# Altium PCB radxa_cm3_io_board_v1360_pcb_layout.PcbDoc (part 1 of 7)
Units mil, origin at the board's own origin, x right, y up, seen from the top; angles counter-clockwise.
Board outline 6299.61 x 3544.09 mil, 4 copper layers (Top, GND, Power, Bottom), stack 35.4 mil thick; 513 components, 397 nets, 1855 pads, 2695 vias.
Unrouted connection lines stored in the file: 280.
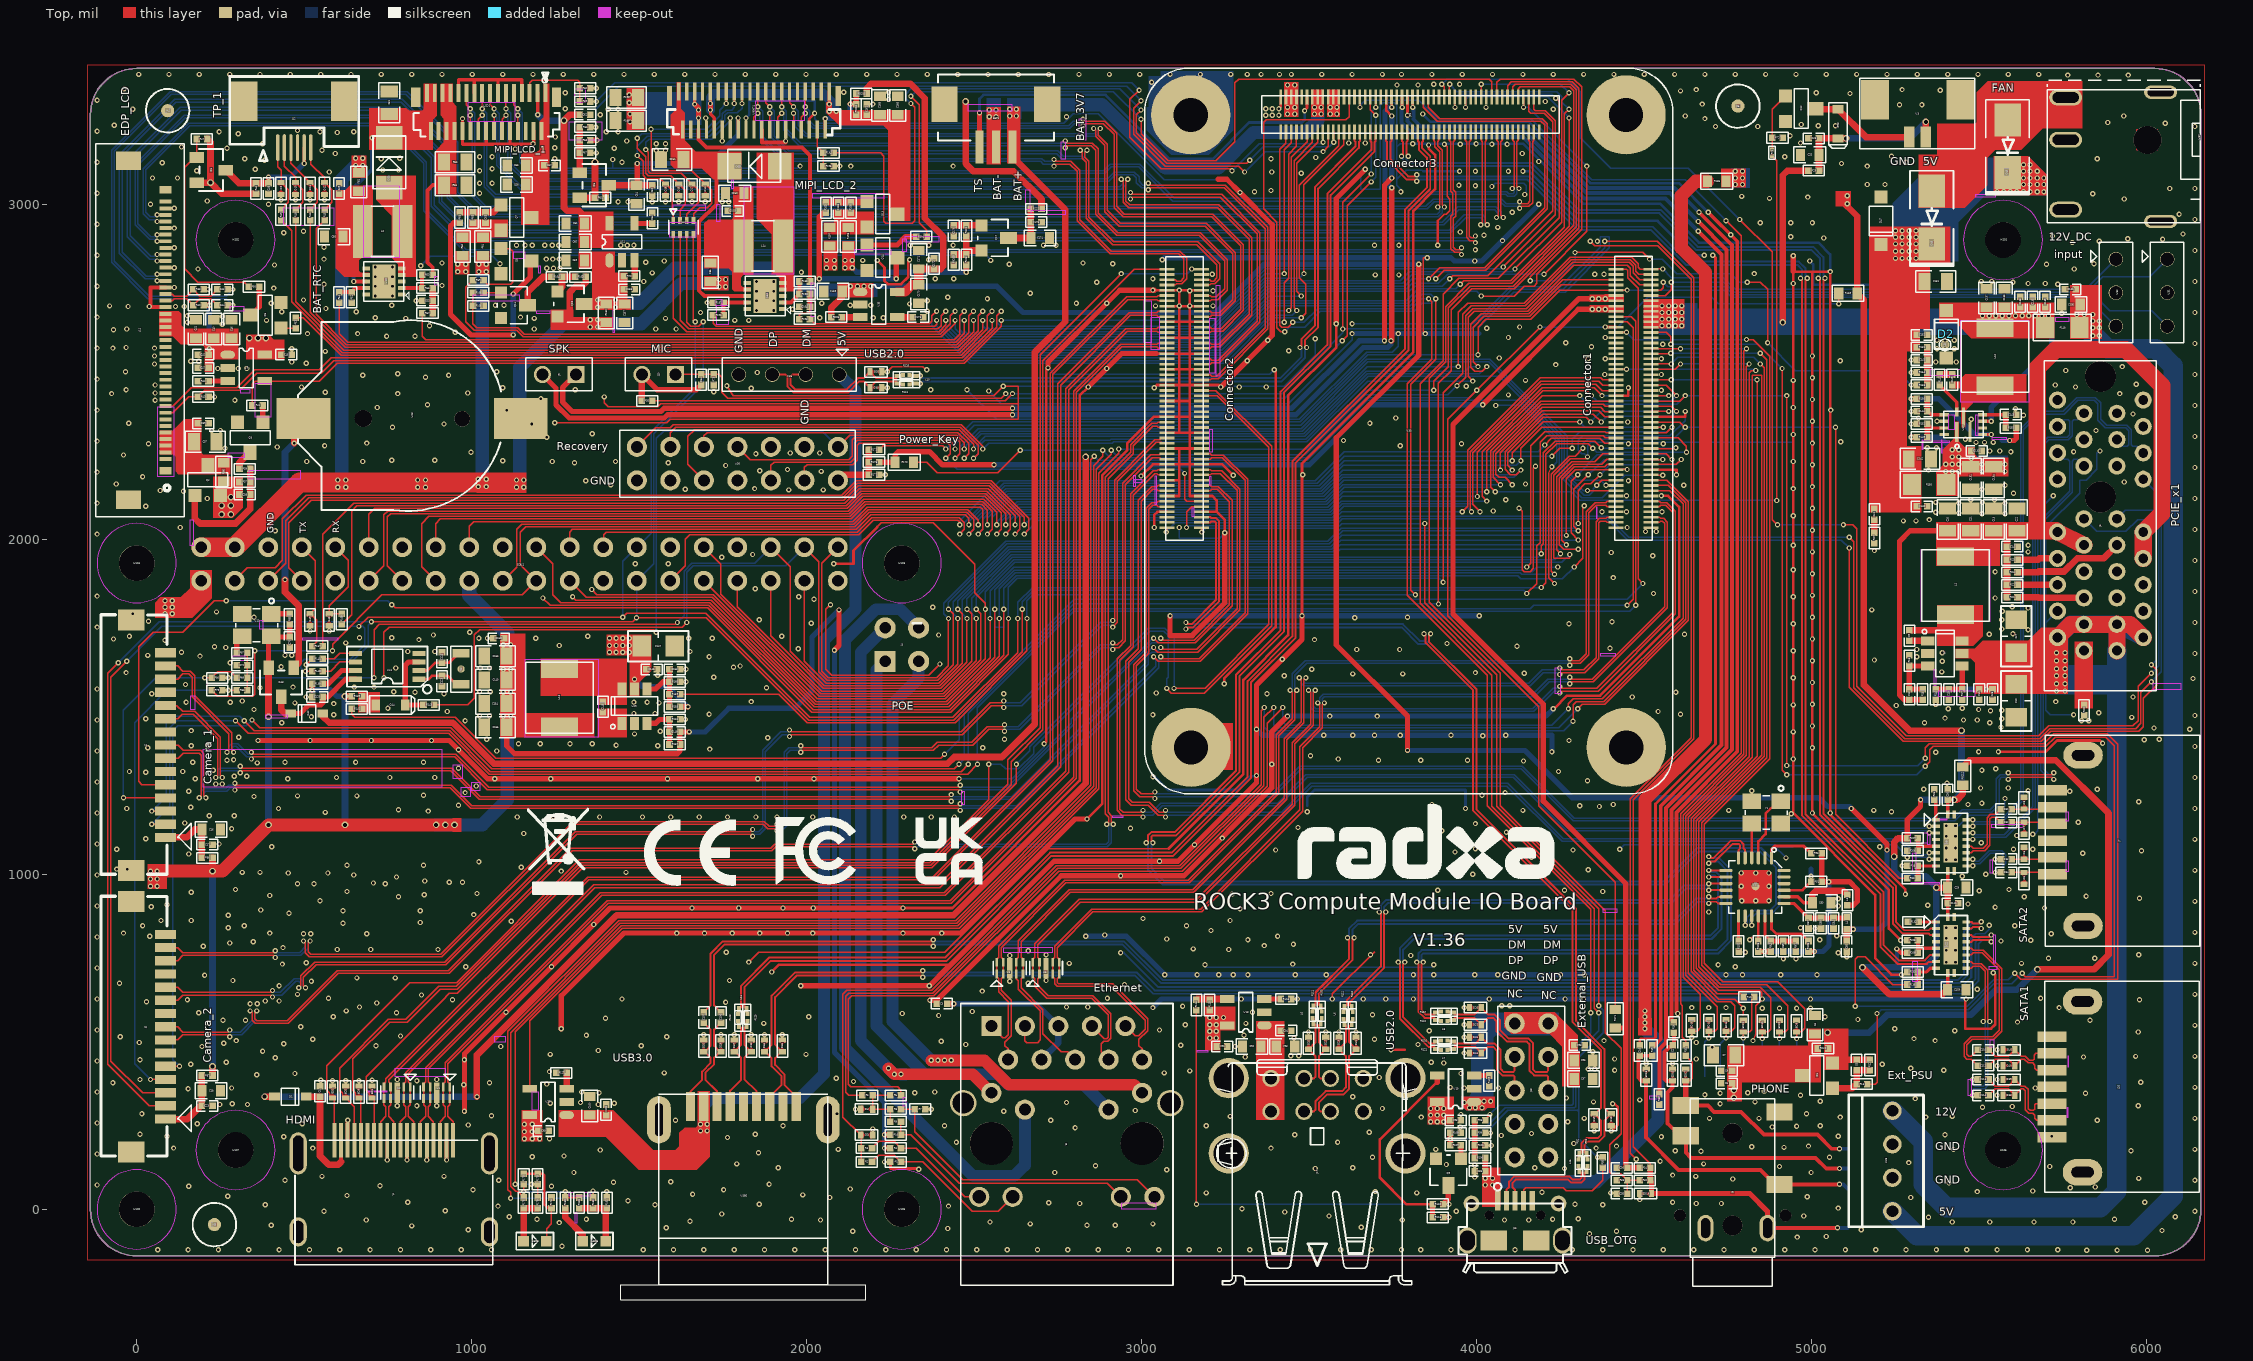
[diagram p0: Top view]
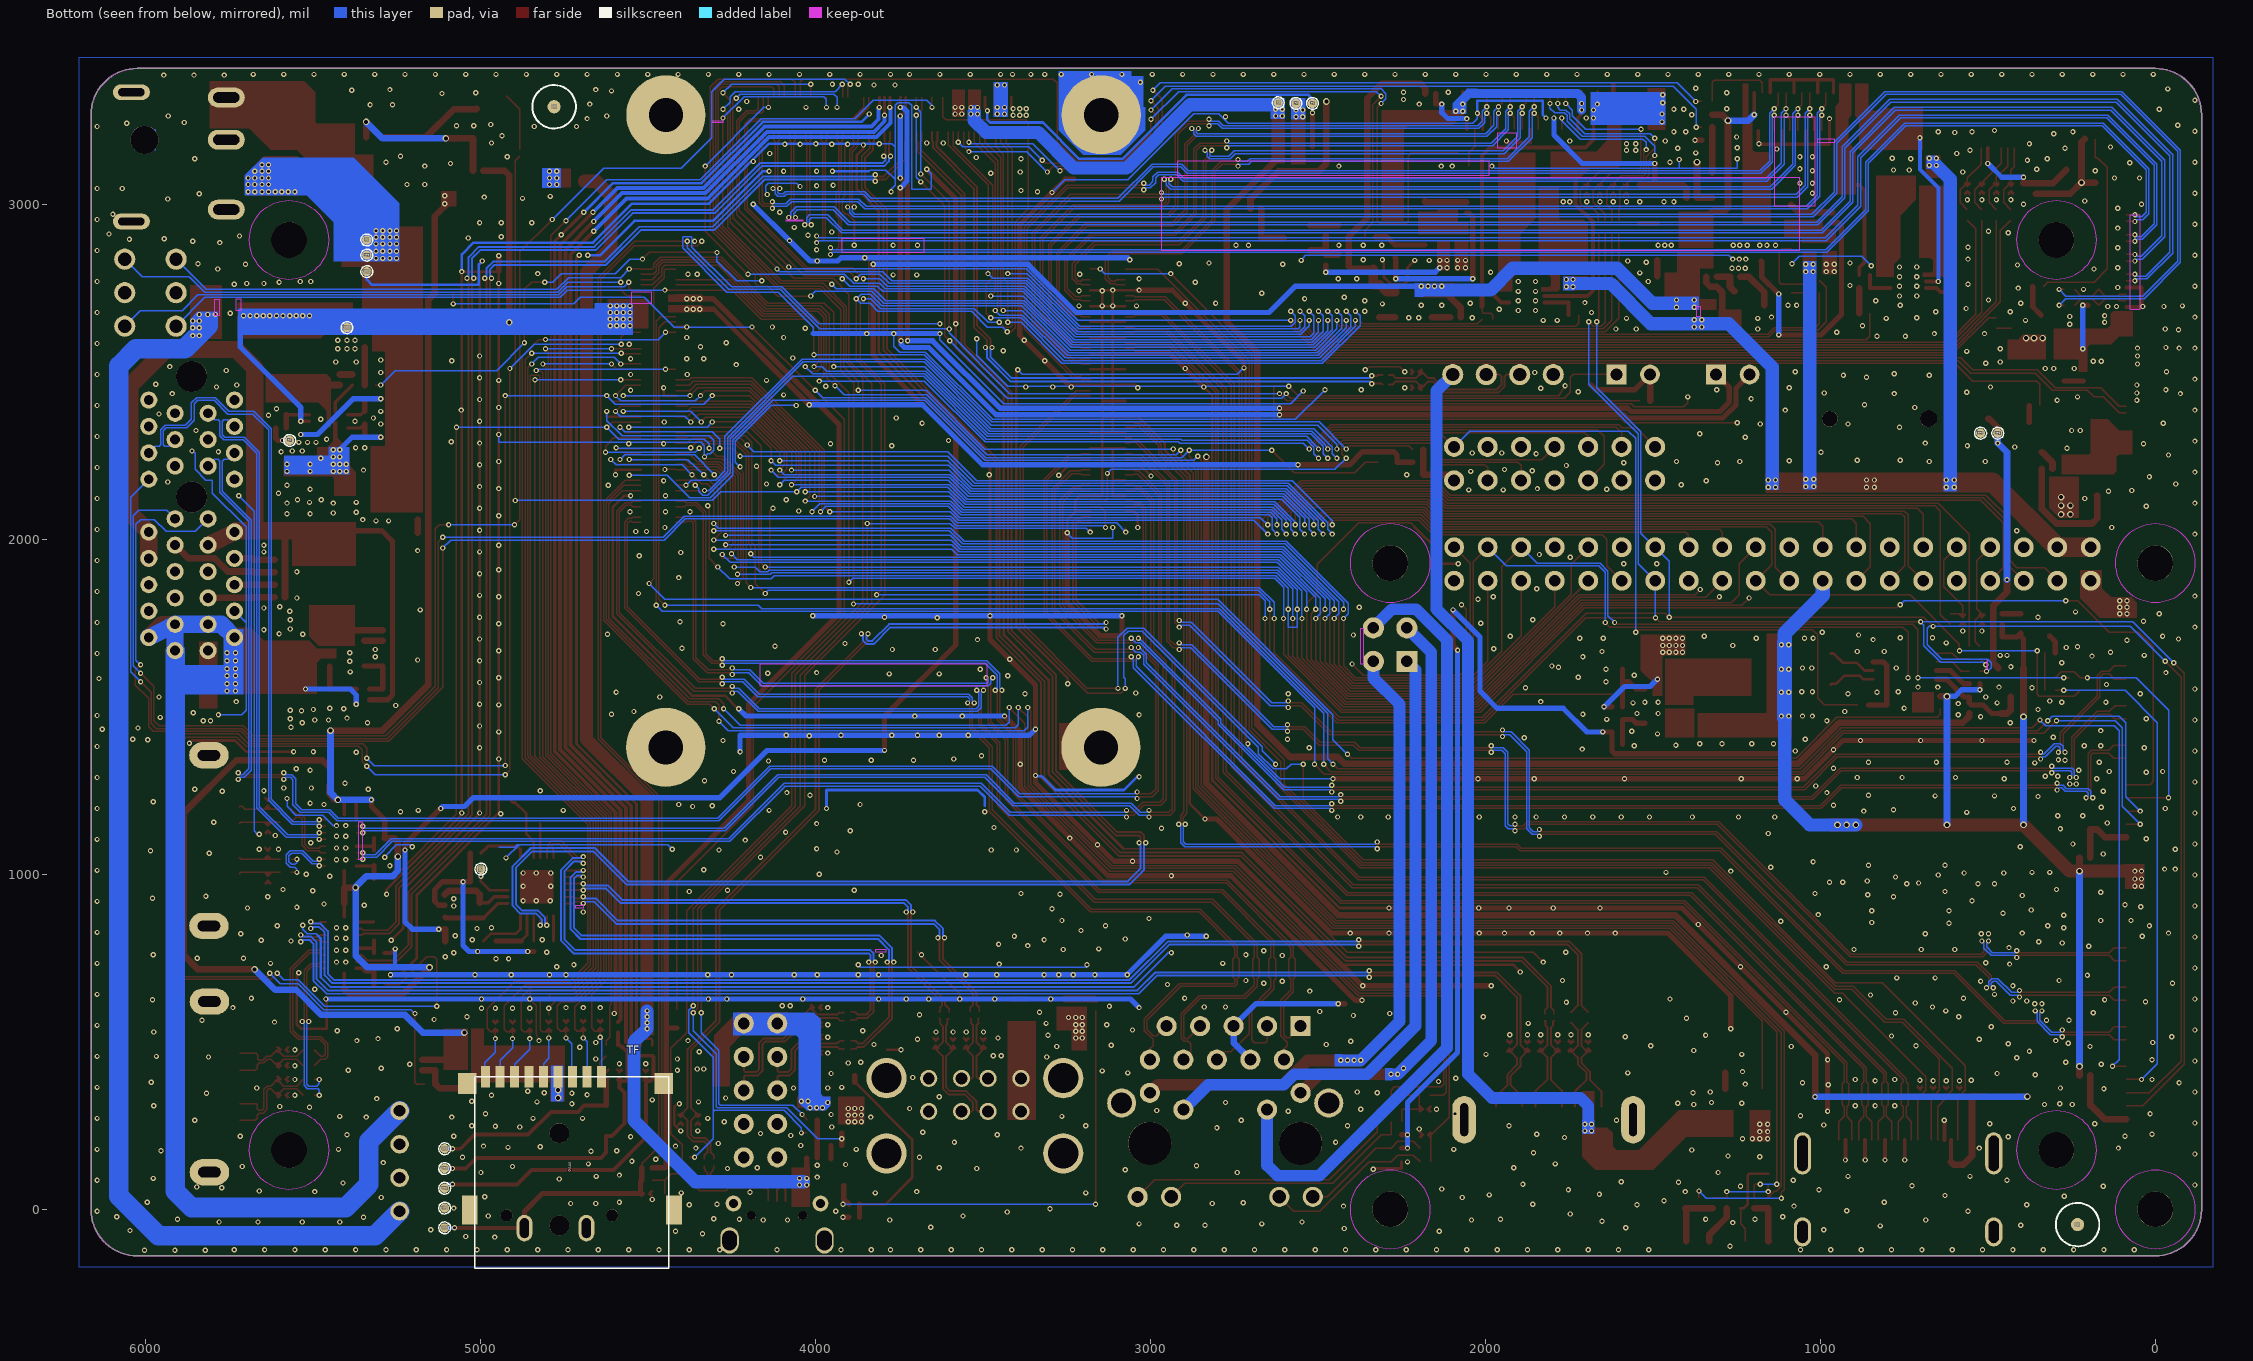
[diagram p1: Bottom view, seen from below]
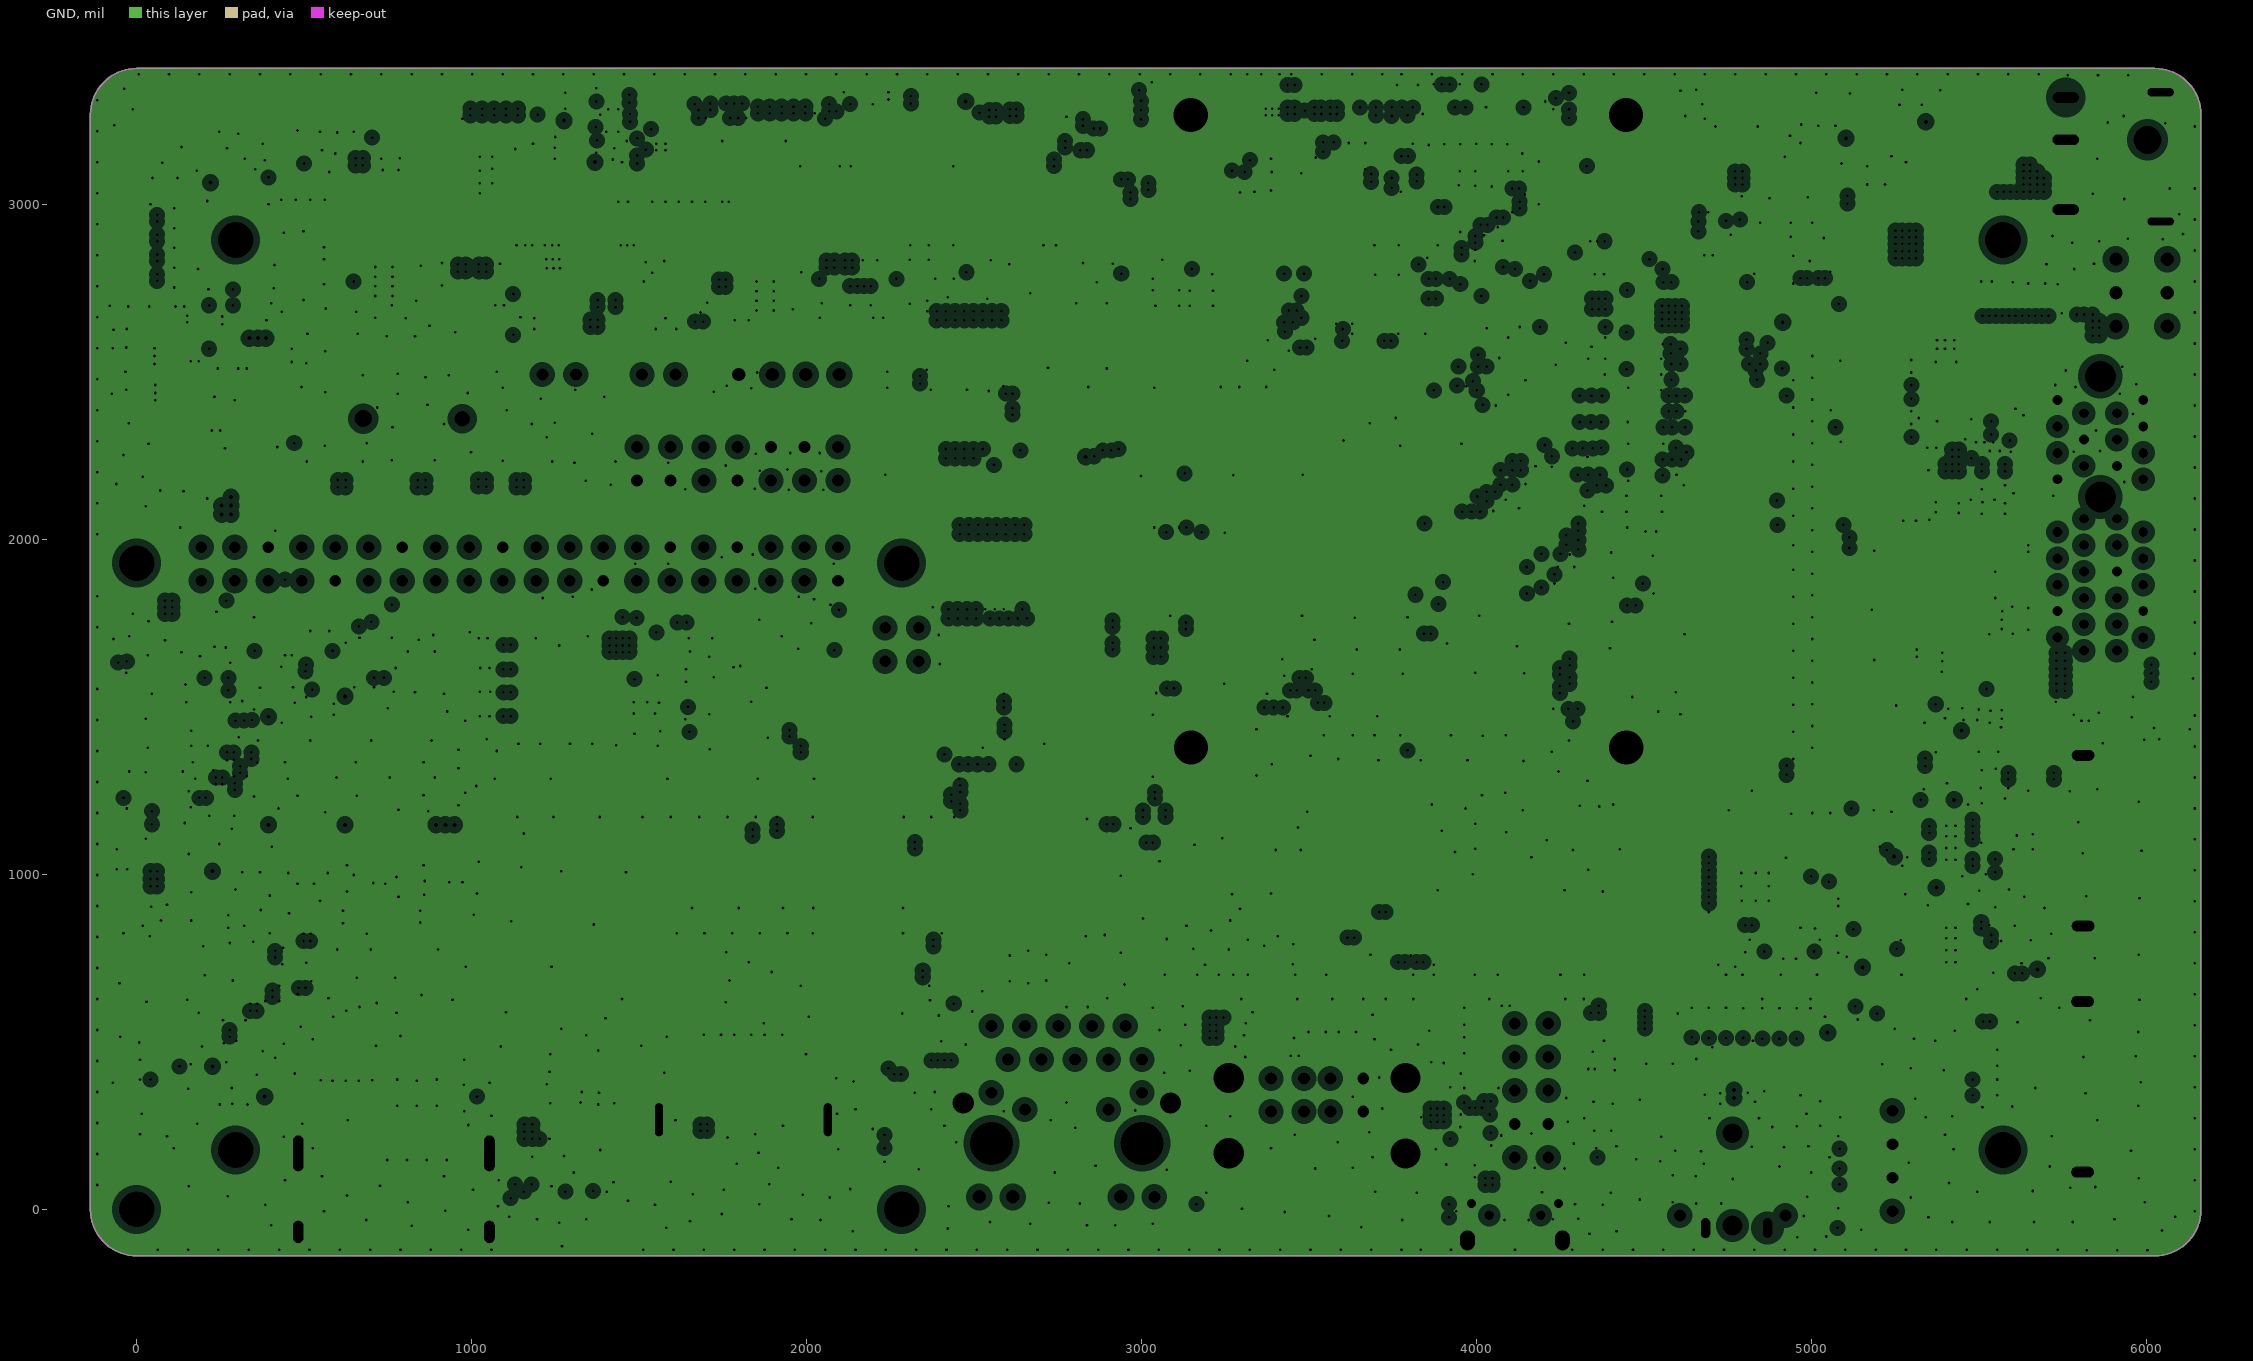
[diagram p2: GND, clearances drawn from the general rule]
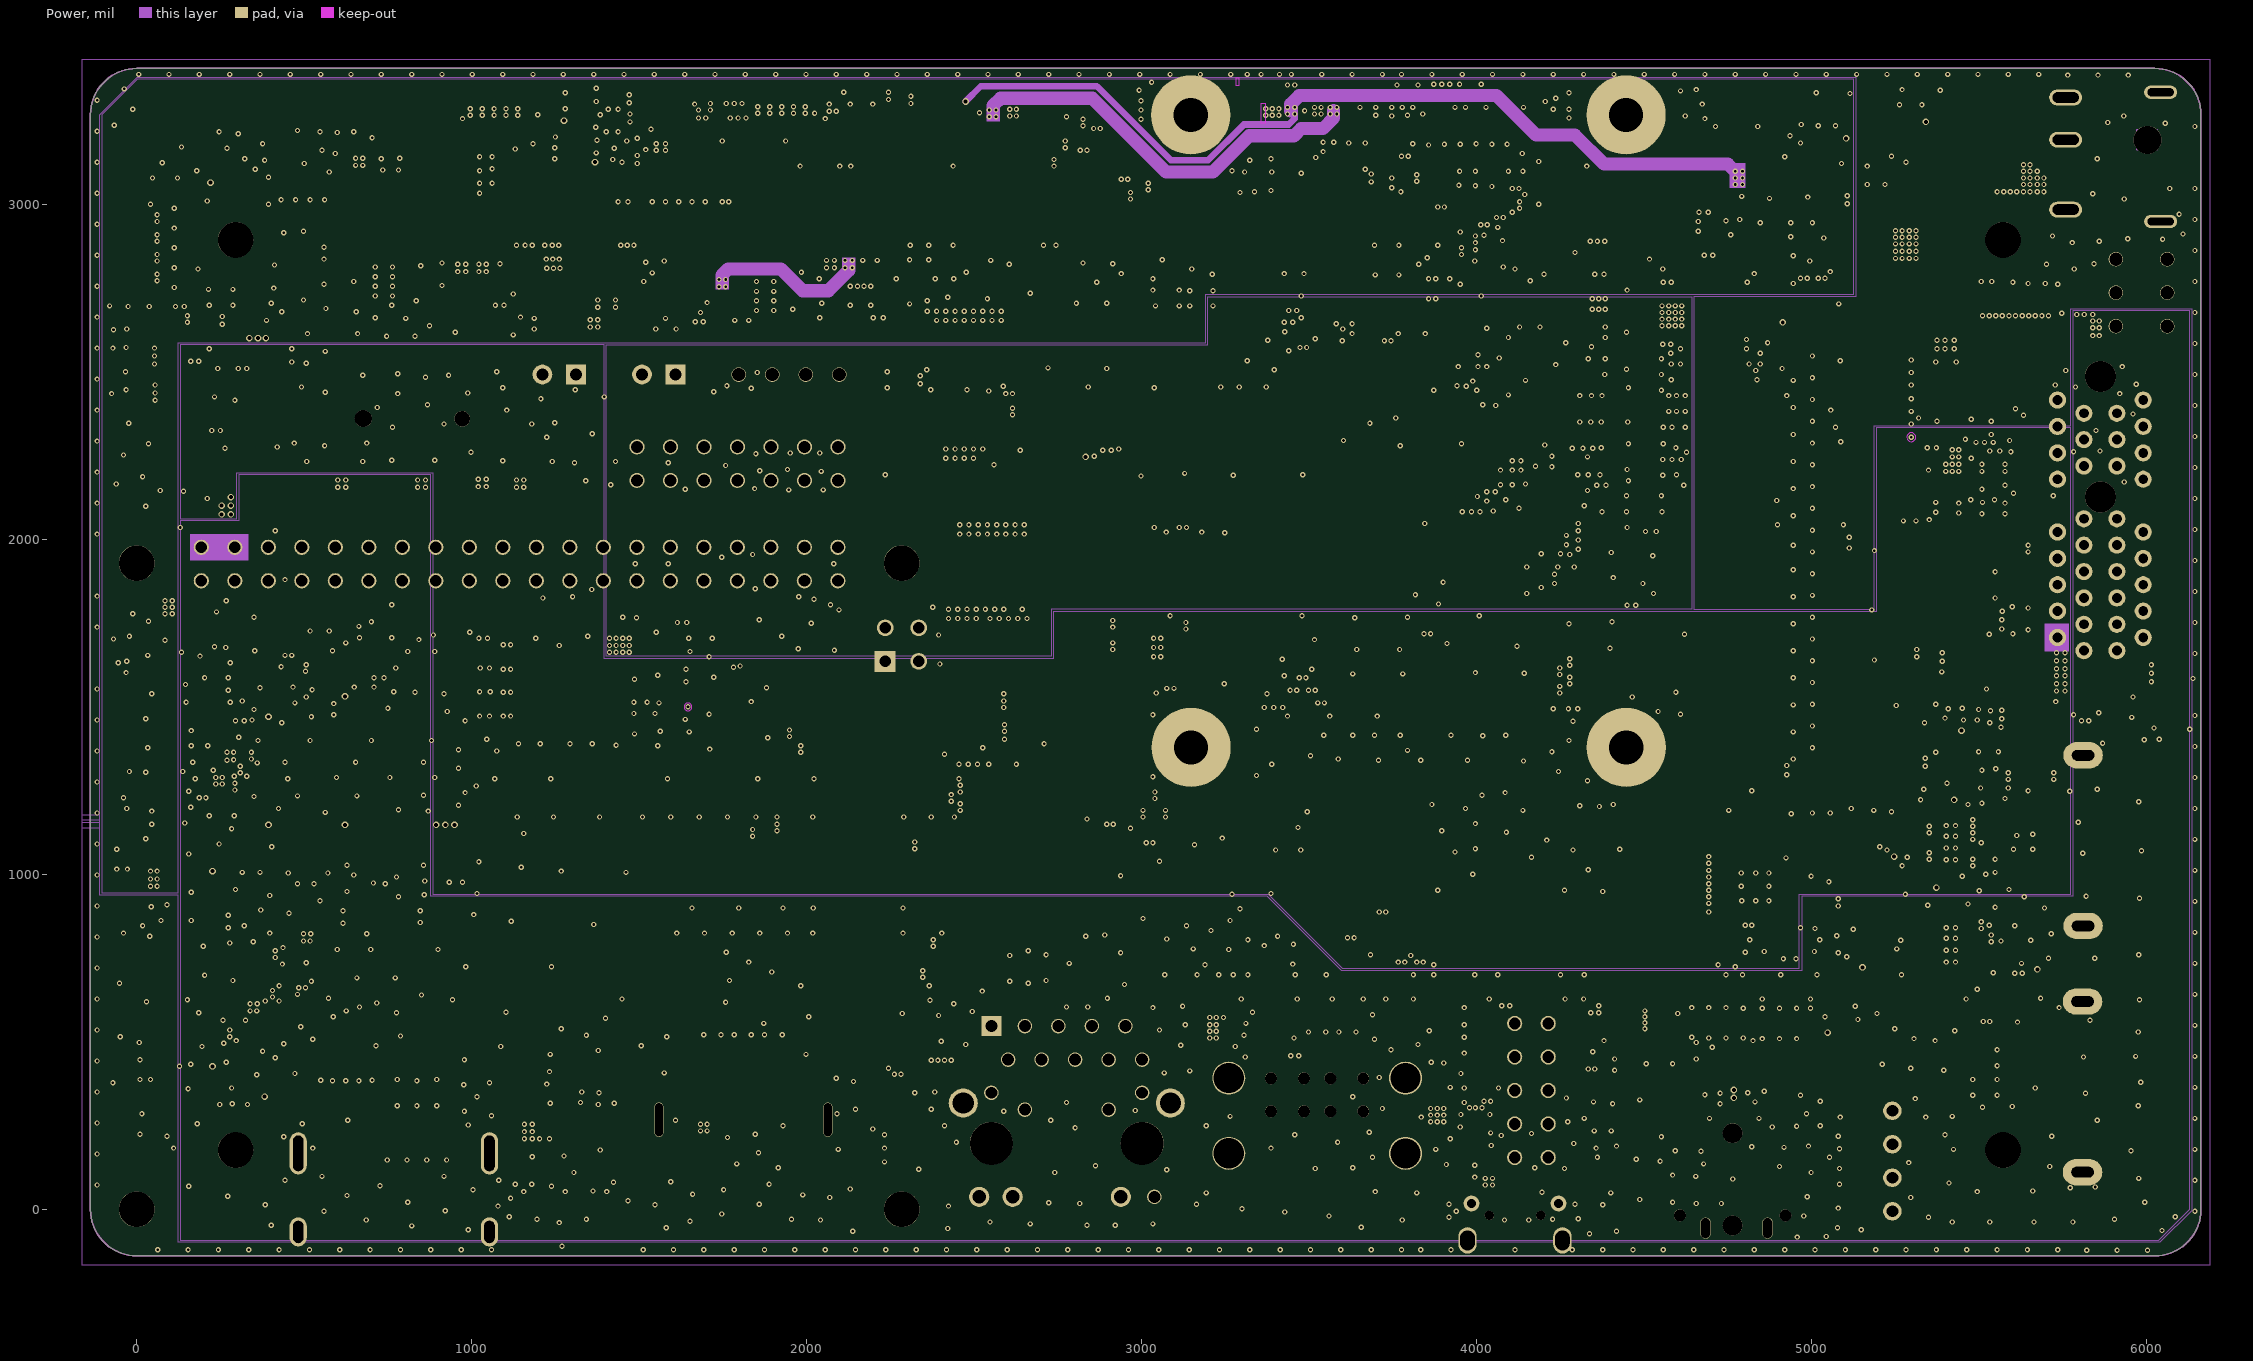
[diagram p3: Power]

## Layer stack, top to bottom
Solder Mask Top: solder mask 0.4, Solder Resist, Dk 3.5
Top: signal copper 1.35
Dielectric 1: dielectric 10, FR-4, Dk 4.3
GND: plane copper 1.35
Dielectric2: dielectric 10, FR-4, Dk 4.3
Power: signal copper 1.35
Dielectric3: dielectric 10, FR-4, Dk 4.3
Bottom: signal copper 1.35
Solder Mask Bottom: solder mask 0.4, Solder Resist, Dk 3.5

## Board outline
-137.8,3267.72 cw(c0,3267.72) 0,3405.51 6024.02,3405.51 cw(c6024.02,3267.72) 6161.81,3267.72 6161.81,-0.79 cw(c6024.02,-0.79) 6024.02,-138.58 0,-138.58 cw(c0,-0.79) -137.8,-0.79

## Design rules (kind name [scope] priority, off if disabled: settings)
Clearance "Clearance - Default - DEFAULT - Via" [IsVia vs IsVia] p1: gap=0 ignorepadtopadclearanceinfootprint=FALSE
Clearance "Clearance - Default - DEFAULT- SMD" [IsVia vs IsSMTPin] p2: gap=0 ignorepadtopadclearanceinfootprint=FALSE
Clearance "Clearance - Default - DEFAULT - Net" [All] p3: gap=3.94 ignorepadtopadclearanceinfootprint=FALSE except(5.91: Arc-Fill Arc-Poly Arc-Region Track-Fill Track-Poly Track-Region SMDPad-Fill SMDPad-Poly SMDPad-Region THPad-Fill THPad-Poly THPad-Region Via-Fill Via-Poly Via-Region Fill-Fill Fill-Poly Fill-Region Poly-Poly Poly-Region Region-Region; 10: Arc-Hole Track-Hole SMDPad-Hole THPad-Hole Via-Hole Fill-Hole Poly-Hole Region-Hole Text-Text Text-Hole)
ComponentClearance "ComponentClearance - Default - DEFAULT" [All] p1: gap=0 collisioncheckmode=3 verticalgap=10 showdistances=FALSE
DiffPairsRouting "DiffPairsRouting - DiffPair - USB3_SSTX" [InDifferentialPairClass('DiffPairClassFor_DP_GAP_39370_Width_59055')] p1: maxlimit=3.94 minlimit=3.94 mostfreqgap=3.94 toplayer_minwidth=5.91 toplayer_maxwidth=5.91 toplayer_prefwidth=5.91 midlayer1_minwidth=5.91 midlayer1_maxwidth=5.91 midlayer1_prefwidth=5.91 bottomlayer_minwidth=5.91 bottomlayer_maxwidth=5.91 bottomlayer_prefwidth=5.91 maxuncoupledlength=500
DiffPairsRouting "DiffPairsRouting - DiffPair - Default" [All] p2: maxlimit=3.94 minlimit=3.94 mostfreqgap=3.94 toplayer_minwidth=3.94 toplayer_maxwidth=3.94 toplayer_prefwidth=3.94 midlayer1_minwidth=3.94 midlayer1_maxwidth=3.94 midlayer1_prefwidth=3.94 bottomlayer_minwidth=3.94 bottomlayer_maxwidth=3.94 bottomlayer_prefwidth=3.94 maxuncoupledlength=500
FanoutControl Fanout_SOIC [IsSOIC] p1: bgadir=Out bgaviamode=Centered fanoutstyle=Auto fanoutdirection=Alternating viagrid=1 // Fanout_SOIC (Default Rule)
FanoutControl Fanout_Small [(CompPinCount < 5)] p2: bgadir=Out bgaviamode=Centered fanoutstyle=Auto fanoutdirection=OutThenIn viagrid=1 // Fanout_Small (Default Rule)
FanoutControl Fanout_LCC [IsLCC] p3: bgadir=Out bgaviamode=Centered fanoutstyle=Auto fanoutdirection=Alternating viagrid=1 // Fanout_LCC (Default Rule)
FanoutControl Fanout_BGA [IsBGA] p4: bgadir=Out bgaviamode=Centered fanoutstyle=Auto fanoutdirection=Alternating viagrid=1 // Fanout_BGA (Default Rule)
HoleToHoleClearance "HoleToHoleClearance - Default - DEFAULT" [All] p1: gap=0 allowstackedmicrovias=TRUE
Length "Default Length" [All] p1: maxlimit=50000 minlimit=0
MaxMinImpedance "Default Impedance" [All] p1: minimum=50.00 maximum=150.0
ParallelSegment "Default Parallel Segment Same Layer" [All] p1: limit=1000 gap=200
ParallelSegment "Default Parallel Segment Adjasent" [All] p2: limit=1000 gap=200
PlaneClearance "PlaneClearance - FootPrint 'DIP_10PIN-2_54MM'" [HasFootprint('DIP_10PIN-2_54MM')] p1: clearance=4.92 // PAD - Power Plane Clearance
PlaneClearance "PlaneClearance - FootPrint 'DIP4PIN-2_54MM-2X2'" [HasFootprint('DIP4PIN-2_54MM-2X2')] p2: clearance=7.5 // PAD - Power Plane Clearance
PlaneClearance "PlaneClearance - FootPrint 'DIP_14PIN-2_54MM'" [HasFootprint('DIP_14PIN-2_54MM')] p3: clearance=4.92 // PAD - Power Plane Clearance
PlaneConnect "Default PlaneConnect" [All] p1: planeconnectstyle=Relief reliefexpansion=20 reliefentries=4 reliefconductorwidth=15 reliefairgap=10
PolygonConnect "PolygonConnect - Default SMT" [IsSMTPin] p1: connectstyle=Direct reliefconductorwidth=10 reliefentries=4 polygonreliefangle="45 Angle" airgapwidth=10
PolygonConnect "PolygonConnect - Default Pad" [All] p2: connectstyle=Relief reliefconductorwidth=15 reliefentries=4 polygonreliefangle="45 Angle" airgapwidth=10
RoutingLayers "RoutingLayers - Default - DEFAULT" [All] p1: top layer_v5=TRUE mid layer 1_v5=TRUE bottom layer_v5=TRUE
RoutingPriority "RoutingPriority - Default - DEFAULT" [All] p1: routingpriority=3
RoutingTopology "Default Routing Topology" [All] p1: topology=Shortest
RoutingVias "RoutingVias - Default - DEFAULT" [All] p1: holewidth=7.87 width=15.75 viastyle="Through Hole" minholewidth=7.87 minwidth=15.75 maxholewidth=7.87 maxwidth=15.75
SMDToCorner "SMDToCorner - Default - DEFAULT" [All] p1: distance=0
SolderMaskExpansion [All] p1: expansion=4 istentingtop=FALSE
Width "Width - Net - GND" [InNet('GND')] p1: maxlimit=196.85 minlimit=3.94 preferedwidth=7.87
Width "Width - NetClass - ClearanceClass_3(RuleSet)" [InNetClass('ClearanceClass_3(RuleSet)') OR InNetClass('ClearanceClass_4(RuleSet)')] p2: maxlimit=196.85 minlimit=3.94 preferedwidth=5.91
Width "Default Width" [All] p3: maxlimit=196.85 minlimit=3.94 preferedwidth=3.94
18 further rules are at their usual default settings.

## Classes and differential pairs
net class ClearanceClass_3(RuleSet): N17857883 N17857891 USB2_HOST3_DM USB2_HOST3_DP
net class ClearanceClass_4(RuleSet): N17858999 N17859001 USB3_SSRXN USB3_SSRXP
differential pair class DiffPairClassFor_DP_GAP_39370_Width_59055: N1785 N178356 N178370 N178578 N178590 N1782032 N1783563 N1783706 USB1_D USB2_D USB2_HOST2_D USB2_HOST3_D USB3_D USB3_HOST1_D USB3_HOST1_SSRX USB3_HOST1_SSTX USB3_SSRX USB3_SSTX USB4_D USB_OTG0_D
differential pair N1797309: +N17973095 -N17973092
differential pair N1797828: +N17978286 -N17978284
differential pair N179782: +N17978288 -N17978290
differential pair N1797308: +N17973086 -N17973089
differential pair N178578: +N17857883 -N17857891
differential pair N1785: +N17858999 -N17859001
differential pair N178590: +N17859027 -N17859034
differential pair EDP_TX_AUX: +EDP_TX_AUXP -EDP_TX_AUXN
differential pair PCIE20_TX: +PCIE20_TXP_1 -PCIE20_TXN_1
differential pair PCIE20_RX: +PCIE20_RXP_1 -PCIE20_RXN_1
differential pair EDP_TX_D0: +EDP_TX_D0N -EDP_TX_D0P
differential pair EDP_TX_D3: +EDP_TX_D3N -EDP_TX_D3P
differential pair EDP_TX_D2: +EDP_TX_D2N -EDP_TX_D2P
differential pair EDP_TX_D1: +EDP_TX_D1N -EDP_TX_D1P
differential pair MIPI_DSI_TX1_D2: +MIPI_DSI_TX1_D2N -MIPI_DSI_TX1_D2P
differential pair MIPI_DSI_TX0_D3: +MIPI_DSI_TX0_D3P/LVDS_TX0_D3P -MIPI_DSI_TX0_D3N/LVDS_TX0_D3N
differential pair MIPI_DSI_TX0_D2: +MIPI_DSI_TX0_D2N/LVDS_TX0_D2N -MIPI_DSI_TX0_D2P/LVDS_TX0_D2P
differential pair MIPI_DSI_TX1_D3: +MIPI_DSI_TX1_D3N -MIPI_DSI_TX1_D3P
differential pair MIPI_DSI_TX1_CLK: +MIPI_DSI_TX1_CLKN -MIPI_DSI_TX1_CLKP
differential pair MIPI_DSI_TX1_D0: +MIPI_DSI_TX1_D0N -MIPI_DSI_TX1_D0P
differential pair MIPI_DSI_TX1_D1: +MIPI_DSI_TX1_D1P -MIPI_DSI_TX1_D1N
differential pair N178356: +N17835661 -N17835643
differential pair N1783706: +N17837061 -N17837067
differential pair N178370: +N17837073 -N17837093
differential pair N1783563: +N17835631 -N17835635
differential pair MIPI_DSI_TX0_D1: +MIPI_DSI_TX0_D1P/LVDS_TX0_D1P -MIPI_DSI_TX0_D1N/LVDS_TX0_D1N
differential pair USB2_HOST2_D: +USB2_HOST2_DP -USB2_HOST2_DM
differential pair N1782032: +N17820324 -N17820323
differential pair USB2_D: +USB2_DM -USB2_DP
differential pair USB1_D: +USB1_DM -USB1_DP
differential pair USB_OTG0_D: +USB_OTG0_DP -USB_OTG0_DM
differential pair USB3_D: +USB3_DP -USB3_DM
differential pair MIPI_DSI_TX0_CLK: +MIPI_DSI_TX0_CLKN/LVDS_TX0_CLKN -MIPI_DSI_TX0_CLKP/LVDS_TX0_CLKP
differential pair PCIE20_REFCLK: +PCIE20_REFCLKN -PCIE20_REFCLKP
differential pair USB4_D: +USB4_DP -USB4_DM
differential pair HDMI_TX2: +HDMI_TX2N_PORT -HDMI_TX2P_PORT
differential pair HDMI_TXCLK: +HDMI_TXCLKN_PORT -HDMI_TXCLKP_PORT
differential pair HDMI_TX0: +HDMI_TX0N_PORT -HDMI_TX0P_PORT
differential pair HDMI_TX1: +HDMI_TX1N_PORT -HDMI_TX1P_PORT
differential pair PHY1_MDI2: +PHY1_MDI2+ -PHY1_MDI2-
differential pair PHY1_MDI1: +PHY1_MDI1+ -PHY1_MDI1-
differential pair PHY1_MDI0: +PHY1_MDI0- -PHY1_MDI0+
differential pair USB2_HOST3_D: +USB2_HOST3_DP -USB2_HOST3_DM
differential pair PHY1_MDI3: +PHY1_MDI3+ -PHY1_MDI3-
differential pair SATA1_TX: +SATA1_TXN -SATA1_TXP
differential pair USB3_HOST1_D: +USB3_HOST1_DP -USB3_HOST1_DM
differential pair PCIE20_TX_1: +PCIE20_TXP -PCIE20_TXN
differential pair USB3_HOST1_SSTX: +USB3_HOST1_SSTXN -USB3_HOST1_SSTXP
differential pair USB3_HOST1_SSRX: +USB3_HOST1_SSRXN -USB3_HOST1_SSRXP
differential pair SATA2_RX: +SATA2_RXP -SATA2_RXN
differential pair SATA2_TX: +SATA2_TXN -SATA2_TXP
differential pair MIPI_DSI_TX0_D0: +MIPI_DSI_TX0_D0P/LVDS_TX0_D0P -MIPI_DSI_TX0_D0N/LVDS_TX0_D0N
differential pair USB3_SSRX: +USB3_SSRXN -USB3_SSRXP
differential pair SATA1_RX: +SATA1_RXP -SATA1_RXN
differential pair PCIE20_RX_1: +PCIE20_RXN -PCIE20_RXP
differential pair USB3_SSTX: +USB3_SSTXP -USB3_SSTXN

## Components (designator, comment, footprint, x,y, rotation, side; value= is the part's Value field where it differs from the comment)
BAT1 "SMD-3P-1.25" SMD-3P-1.25 2564.96,3171.26 r180 top
C1 "C0402" C0402 547.24,352.36 r90 top
C2 "C0402" C0402 4584.65,474.41 r270 top
C3 "C0402" C0402 2403.54,614.17 r0 top
C4 "C0603" C0603 5009.84,551.18 r90 top
C5 "C0402" C0402 4746.06,375.98 r180 top
C6 "C0402" C0402 5133.86,431.1 r270 top
C7 "C0805" C0805 4738.19,460.63 r180 top
C8 "C0402" C0402 4746.06,413.39 r180 top
C9 "C0402" C0402 5291.34,1712.6 r90 top
C10 "C1206" C1206 5610.24,1517.72 r270 top
C11 "C0402" C0402 5500,1537.4 r270 top
C12 "C0402" C0402 5291.34,1537.4 r90 top
C13 "C0805" C0805 5543.31,2059.06 r90 top
C14 "C0402" C0402 5598.43,1978.35 r0 top
C15 "C0402" C0402 4486.22,474.41 r90 top
C16 "C0603" C0603 222.44,1133.86 r0 top
C17 "C0402" C0402 210.63,1088.58 r0 top
C18 "C0603" C0603 222.44,354.33 r0 top
C19 "C0402" C0402 5409.45,1537.4 r270 top
C20 "C0805" C0805 5405.51,2059.06 r90 top
C21 "C0805" C0805 5474.41,2059.06 r90 top
C22 "C0805" C0805 5612.2,2059.06 r90 top
C23 "C0402" C0402 210.63,309.06 r0 top
C24 "C0402" C0402 5187.01,2074.8 r270 top
C25 "C0603" C0603 4994.09,3147.64 r0 top
C26 "C0402" C0402 5005.91,3196.85 r0 top
C27 "C1206" C1206 5610.24,1710.63 r90 top
C28 "C0402" C0402 5539.37,1537.4 r270 top
C29 "C0603" C0603 5433.07,960.63 r0 top
C30 "C0402" C0402 5405.51,1238.19 r90 top
C31 "C0402" C0402 5580.71,1194.88 r0 top
C32 "C0402" C0402 5580.71,1155.51 r0 top
C33 "C0402" C0402 5580.71,1045.28 r0 top
C34 "C0402" C0402 5580.71,1005.91 r0 top
C35 "C0402" C0402 4433.07,47.24 r180 top
C36 "C0402" C0402 4433.07,124.02 r180 top
C37 "C0805" C0805 204.72,2291.34 r0 top
C38 "C0402" C0402 322.83,2133.86 r0 top
C39 "C0402" C0402 198.82,2346.46 r0 top
C40 "C0603" C0603 230.31,2627.95 r90 top
C41 "C0603" C0603 177.17,2627.95 r90 top
C42 "C0402" C0402 198.82,2551.18 r180 top
C43 "C0402" C0402 255.91,2746.06 r180 top
C44 "C0402" C0402 255.91,2698.82 r0 top
C45 "C0402" C0402 446.85,2551.18 r0 top
C46 "C0603" C0603 283.46,2627.95 r90 top
C47 "C0402" C0402 198.82,2511.81 r180 top
C48 "C0402" C0402 393.7,3047.24 r270 top
C49 "C0402" C0402 604.33,3047.24 r90 top
C50 "C0603" C0603 588.58,2903.54 r180 top
C51 "C0805" C0805 753.94,3303.15 r90 top
C52 "C0402" C0402 1539.37,3041.34 r270 top
C53 "C0402" C0402 868.11,2712.6 r0 top
C54 "C0603" C0603 1492.13,3029.53 r270 top
C55 "C0402" C0402 1041.34,2960.63 r90 top
C56 "C0603" C0603 1133.86,3116.14 r180 top
C57 "C0402" C0402 1232.28,3116.14 r0 top
C58 "C0603" C0603 1133.86,3059.06 r180 top
C59 "C0603" C0603 1309.06,2832.68 r180 top
C60 "C0603" C0603 1309.06,2887.8 r180 top
C61 "C0603" C0603 1309.06,2942.91 r180 top
C62 "C0402" C0402 1338.58,3267.72 r0 top
C63 "C0402" C0402 1539.37,2958.66 r90 top
C64 "C0402" C0402 1685.04,2476.38 r90 top
C70 "C0402" C0402 456.69,1692.91 r270 top
C72 "C0402" C0402 314.96,1624.02 r180 top
C83 "C0603" C0603 5029.53,915.35 r180 top
C84 "C0402" C0402 5064.96,854.33 r270 top
C85 "C0402" C0402 5104.33,785.43 r270 top
C86 "C0402" C0402 4009.84,114.17 r180 top
C87 "C0402" C0402 4990.16,854.33 r270 top
C88 "C0402" C0402 5027.56,854.33 r270 top
C89 "C0402" C0402 4915.35,785.43 r270 top
C91 "C0402" C0402 3240.16,486.22 r0 top
C92 "C0603" C0603 3328.74,486.22 r180 top
C93 "C0603" C0603 3429.13,486.22 r0 top
C94 "C0402" C0402 3431.1,533.46 r0 top
C95 "C0402" C0402 3937.01,265.75 r0 top
C96 "C0603" C0603 4318.9,444.88 r0 top
C97 "C0603" C0603 4318.9,389.76 r0 top
C98 "C0402" C0402 4307.09,490.16 r0 top
C99 "C0402" C0402 1214.57,234.25 r0 top
C100 "C0603" C0603 1352.36,309.06 r90 top
C101 "C0402" C0402 1401.57,297.24 r90 top
C106 "C0402" C0402 1744.09,572.83 r270 top
C107 "C0402" C0402 1692.91,572.83 r270 top
C109 "C0603" C0603 5433.07,655.51 r0 top
C110 "C0402" C0402 5511.81,476.38 r0 top
C111 "C0402" C0402 5421.26,913.39 r0 top
C112 "C0402" C0402 5511.81,429.13 r0 top
C113 "C0402" C0402 5511.81,387.8 r0 top
C114 "C0402" C0402 5511.81,340.55 r0 top
C123 "C0402" C0402 911.42,1576.77 r270 top
C124 "C0402" C0402 911.42,1647.64 r90 top
C125 "C0402" C0402 539.37,1529.53 r180 top
C129 "C0402" C0402 5419.29,2476.38 r270 top
C130 "C0603" C0603 5773.62,2700.79 r180 top
C131 "C0402" C0402 5771.65,2746.06 r180 top
C132 "C0805" C0805 5474.41,2183.07 r270 top
C133 "C0402" C0402 5492.13,2263.78 r0 top
C134 "C0805" C0805 5543.31,2183.07 r270 top
C135 "C0402" C0402 5659.45,2708.66 r90 top
C136 "C0603" C0603 5574.8,2720.47 r90 top
C137 "C0603" C0603 5521.65,2720.47 r90 top
C138 "C0402" C0402 5622.05,2708.66 r90 top
C139 "C0402" C0402 5696.85,2708.66 r90 top
C140 "C0402" C0402 5328.74,2098.43 r0 top
C141 "C0402" C0402 5328.74,2535.43 r180 top
C142 "C0805" C0805 5322.83,2240.16 r0 top
C143 "C0402" C0402 5594.49,2372.05 r0 top
C144 "C0402" C0402 5328.74,2381.89 r180 top
C145 "C0402" C0402 1391.73,1500 r90 top
C146 "C0402" C0402 1537.4,1612.2 r0 top
C147 "C1206" C1206 1557.09,1681.1 r0 top
C148 "C0402" C0402 1606.3,1425.2 r180 top
C149 "C0805" C0805 1070.87,1580.71 r180 top
C150 "C0402" C0402 1080.71,1704.72 r180 top
C151 "C0805" C0805 5370.08,2769.68 r180 top
C152 "C0402" C0402 5328.74,2610.24 r0 top
C153 "C0402" C0402 1606.3,1612.2 r0 top
C154 "C0805" C0805 1070.87,1509.84 r180 top
C155 "C0805" C0805 1070.87,1438.98 r180 top
C156 "C0805" C0805 1070.87,1651.57 r180 top
C157 "C0603" C0603 1456.69,2675.2 r270 top
C158 "C0402" C0402 1470.47,2746.06 r0 top
C159 "C0402" C0402 1779.53,2980.31 r180 top
C160 "C0603" C0603 1785.43,3033.46 r180 top
C161 "C0805" C0805 1598.43,3133.86 r180 top
C164 "C0402" C0402 1994.09,2694.88 r0 top
C165 "C0402" C0402 2094.49,2990.16 r90 top
C166 "C0603" C0603 2271.65,3295.28 r90 top
C167 "C0402" C0402 2179.13,3283.46 r90 top
C168 "C0603" C0603 2218.5,3295.28 r90 top
C169 "C0603" C0603 2078.74,2740.16 r180 top
C170 "C0603" C0603 2334.65,2732.28 r270 top
C171 "C0603" C0603 2334.65,2834.65 r90 top
C172 "C0402" C0402 2379.92,2822.83 r90 top
C173 "C0402" C0402 2332.68,2663.39 r0 top
C174 "C0603" C0603 2696.85,2899.61 r0 top
C175 "C0402" C0402 2685.04,2946.85 r0 top
C176 "C0402" C0402 2438.98,2921.26 r270 top
CN14A1 "TF-CKT01-009D" TF-CKT01-009D 4763.78,-18.11 r270 bottom
CON1 "DIP40PIN_2D54MM" DIP40PIN_2D54MM 192.91,1976.38 r0 top
D1 "SOD_323" SOD_323 458.66,336.61 r0 top
D2 "SOD_123" SOD_123 5401.57,2612.2 r90 top
D3 "ESD0402_1XD5" ESD0402_1XD5 2179.13,222.44 r180 top
D4 "ESD0402_1XD5" ESD0402_1XD5 2179.13,299.21 r0 top
D5 "ESD0402_1XD5" ESD0402_1XD5 5633.86,988.19 r90 top
D6 "ESD0402_1XD5" ESD0402_1XD5 5633.86,1062.99 r270 top
D7 "ESD0402_1XD5" ESD0402_1XD5 5633.86,1137.8 r90 top
D8 "ESD0402_1XD5" ESD0402_1XD5 5633.86,1212.6 r270 top
D9 "ESD0402_1XD5" ESD0402_1XD5 431.1,3047.24 r90 top
D10 "ESD0402_1XD5" ESD0402_1XD5 474.41,3047.24 r90 top
D11 "ESD0402_1XD5" ESD0402_1XD5 517.72,3047.24 r90 top
D12 "ESD0402_1XD5" ESD0402_1XD5 561.02,3047.24 r90 top
D13 "DO214AC" DO214AC 753.94,3190.94 r270 top
D14 "ESD0402_1XD5" ESD0402_1XD5 1696.85,3043.31 r270 top
D15 "ESD0402_1XD5" ESD0402_1XD5 1618.11,3043.31 r270 top
D16 "ESD0402_1XD5" ESD0402_1XD5 1578.74,3043.31 r270 top
D17 "ESD0402_1XD5" ESD0402_1XD5 1657.48,3043.31 r270 top
D18 "ESD0402_1XD5" ESD0402_1XD5 4401.57,267.72 r90 top
D19 "ESD0402_1XD5" ESD0402_1XD5 4350.39,267.72 r90 top
D20 "ESD0402_1XD5" ESD0402_1XD5 3498.03,496.06 r270 top
D21 "ESD0402_1XD5" ESD0402_1XD5 3549.21,496.06 r270 top
D22 "ESD0402_1XD5" ESD0402_1XD5 3639.76,496.06 r270 top
D23 "ESD0402_1XD5" ESD0402_1XD5 3588.58,496.06 r270 top
D24 "ESD0402_1XD5" ESD0402_1XD5 3996.06,466.54 r0 top
D25 "ESD0402_1XD5" ESD0402_1XD5 3996.06,513.78 r0 top
D26 "ESD0402_1XD5" ESD0402_1XD5 3996.06,602.36 r0 top
D27 "ESD0402_1XD5" ESD0402_1XD5 3996.06,551.18 r0 top
D28 "SOD323" SOD323 5078.74,3240.16 r270 top
D30 "ESD0402_1XD5" ESD0402_1XD5 2206.69,2452.76 r180 top
D31 "ESD0402_1XD5" ESD0402_1XD5 2206.69,2500 r180 top
D32 "ESD0402_1XD5" ESD0402_1XD5 1692.91,488.19 r270 top
D33 "ESD0402_1XD5" ESD0402_1XD5 1744.09,488.19 r270 top
D34 "ESD0402_1XD5" ESD0402_1XD5 1874.02,488.19 r270 top
D35 "ESD0402_1XD5" ESD0402_1XD5 1927.17,488.19 r270 top
D36 "ESD0402_1XD5" ESD0402_1XD5 1834.65,488.19 r270 top
D37 "ESD0402_1XD5" ESD0402_1XD5 1783.46,488.19 r270 top
D38 "ESD0402_1XD5" ESD0402_1XD5 5588.58,340.55 r0 top
D39 "ESD0402_1XD5" ESD0402_1XD5 5588.58,387.8 r0 top
D40 "ESD0402_1XD5" ESD0402_1XD5 5588.58,429.13 r0 top
D41 "ESD0402_1XD5" ESD0402_1XD5 5588.58,476.38 r0 top
D42 "SOD_323" SOD_323 507.87,1480.31 r180 top
D43 "SOT_23" SOT_23 431.1,1572.83 r180 top
D44 "SOD323" SOD323 757.87,1505.91 r0 top
D45 "DO_214AC" DO_214AC 5584.65,3173.23 r270 top
D46 "DO_214AC" DO_214AC 5358.27,2960.63 r270 top
D47 "SOD_123" SOD_123 5206.69,2950.79 r270 top
D48 "ESD0402_1XD5" ESD0402_1XD5 574.8,1759.84 r90 top
D49 "ESD0402_1XD5" ESD0402_1XD5 517.72,1759.84 r90 top
D50 "DO214AC" DO214AC 1777.56,3114.17 r0 top
ED1 "ESD0402_1XD5" ESD0402_1XD5 584.65,350.39 r90 top
ED2 "ESD0402_1XD5" ESD0402_1XD5 624.02,350.39 r90 top
ED3 "ESD0402_1XD5" ESD0402_1XD5 663.39,350.39 r90 top
ED4 "ESD0402_1XD5" ESD0402_1XD5 702.76,350.39 r90 top
ED9 "ESD0402_1XD5" ESD0402_1XD5 4954.72,547.24 r90 top
ED10 "ESD0402_1XD5" ESD0402_1XD5 4903.54,547.24 r90 top
ED11 "ESD0402_1XD5" ESD0402_1XD5 4852.36,547.24 r90 top
ED12 "ESD0402_1XD5" ESD0402_1XD5 4795.28,547.24 r90 top
ED13 "ESD0402_1XD5" ESD0402_1XD5 4744.09,549.21 r90 top
ED14 "ESD0402_1XD5" ESD0402_1XD5 4692.91,549.21 r90 top
ED15 "ESD0402_1XD5" ESD0402_1XD5 4641.73,549.21 r90 top
ED16 "ESD0402_1XD5" ESD0402_1XD5 4584.65,401.57 r90 top
ED17 "ESD0402_1XD5" ESD0402_1XD5 4624.02,401.57 r90 top
ED18 "ESD0402_1XD5" ESD0402_1XD5 4505.91,401.57 r90 top
ED19 "ESD0402_1XD5" ESD0402_1XD5 4503.94,47.24 r180 top
FB1 "R0603" R0603 663.39,3066.93 r270 top
FB5 "R0603" R0603 1712.6,2797.24 r90 top
FB6 "R0402" R0402 210.63,1049.21 r180 top
FB7 "R0402" R0402 210.63,399.61 r180 top
H100 "HOLE_R6_2D7MM" HOLE_R6_2D7MM 0,0 r0 top
H101 "HOLE_R6_2D7MM" HOLE_R6_2D7MM 5570.87,2893.7 r0 top
H102 "HOLE_R6_2D7MM" HOLE_R6_2D7MM 295.28,2893.7 r0 top
H103 "HOLE_R6_2D7MM" HOLE_R6_2D7MM 2283.46,1929.13 r0 top
H104 "HOLE_R6_2D7MM" HOLE_R6_2D7MM 0,1929.13 r0 top
H105 "HOLE_R6_2D7MM" HOLE_R6_2D7MM 5570.87,177.17 r0 top
H106 "HOLE_R6_2D7MM" HOLE_R6_2D7MM 2283.46,0 r0 top
H107 "HOLE_R6_2D7MM" HOLE_R6_2D7MM 295.28,177.17 r0 top
J1 "HDMIA19S" HDMIA19S 767.72,206.69 r180 top
J2 "FPC_15PIN_1MM" FPC_15PIN_1MM 86.61,1661.42 r90 top
J3 "RJ45_HRK1" RJ45_HRK1 2551.18,547.24 r0 top
J4 "DIP4PIN-2_54MM-2X2" DIP4PIN-2_54MM-2X2 2234.25,1635.83 r90 top
J5 "FPC_15PIN_1MM" FPC_15PIN_1MM 86.61,820.87 r90 top
J6 "PCIEX1_36PIN_DIP" PCIEX1_36PIN_DIP 5861.42,2126.38 r90 top
J7 "SMD_SATA_7P_50_180" SMD_SATA_7P_50_180 5719.29,1250.79 r270 top
J8 "PJ-327A" PJ-327A 4763.78,-48.03 r90 top
J9 "DIP2PIN-2P54MM" DIP2PIN-2P54MM 1311.02,2492.13 r270 top
J10 "DIP2PIN-2P54MM" DIP2PIN-2P54MM 1608.27,2492.13 r270 top
J11 "20455-040E-TOP" 20455-040E-TOP 86.61,2204.72 r270 top
J12 "FPC6-0.5MM-2660H" FPC6-0.5MM-2660H 470.47,3169.29 r180 top
J16 "MICRO_USB_NJ2" MICRO_USB_NJ2 4114.17,17.72 r0 top
J17 "USB_DUAL" USB_DUAL 3523.62,167.32 r90 top
J18 "DIP_10PIN-2_54MM" DIP_10PIN-2_54MM 4163.39,354.33 r270 top
J20 "SMD_SATA_7P_50_180" SMD_SATA_7P_50_180 5717.72,515.75 r270 top
J24 "DF40C_100DS" DF40C_100DS 4245.47,3323.62 r270 top
L1 "IND-5020" IND-5020 5429.13,1862.2 r90 top
L2 "IND-4X4" IND-4X4 734.25,2919.29 r0 top
L3 "R0402" R0402 5106.3,923.23 r270 top
L4 "L0402" L0402 5104.33,854.33 r90 top
L5 "RP2_0405" RP2_0405 3523.62,580.71 r90 top
L6 "RP2_0405" RP2_0405 3616.14,578.74 r90 top
L7 "RP2_0405" RP2_0405 3903.54,490.16 r180 top
L8 "RP2_0405" RP2_0405 3903.54,576.77 r180 top
L10 "RP2_0405" RP2_0405 2297.24,2476.38 r0 top
L11 "RP2_0405" RP2_0405 1809.06,572.83 r270 top
L12 "IND-5020" IND-5020 5547.24,2545.28 r90 top
L13 "IND-5020" IND-5020 1261.81,1527.56 r270 top
L14 "IND-4X4" IND-4X4 1870.08,2875.98 r0 top
L15 "RP2_0405" RP2_0405 4316.93,139.76 r270 top
LCD1 "FH35C_31P_0_6SHW_LCD" FH35C_31P_0_6SHW_LCD 1220.47,3332.68 r180 top
LED3 "LED0603" LED0603 1188.98,-94.49 r0 top
LED4 "LED0603" LED0603 1366.14,-94.49 r0 top
M1 "MARK" MARK 4779.53,3291.34 r180 bottom
M2 "MARK" MARK 232.28,-45.28 r180 bottom
M3 "MARK" MARK 232.28,-45.28 r0 top
M4 "MARK" MARK 92.52,3279.53 r0 top
M5 "MARK" MARK 4779.53,3293.31 r0 top
P1 "TP_0R70" TP_0R70 2618.11,3303.15 r180 bottom
P2 "TP_0R70" TP_0R70 2515.75,3301.18 r180 bottom
P3 "TP_0R70" TP_0R70 2564.96,3301.18 r180 bottom
P4 "TP_0R70" TP_0R70 5568.9,2295.28 r180 bottom
P5 "TP_0R70" TP_0R70 5338.58,2893.7 r180 bottom
P6 "TP_0R70" TP_0R70 5397.64,2580.71 r0 top
Q1 "SOT23" SOT23 5017.72,399.61 r90 top
Q2 "SOT23" SOT23 212.6,2175.2 r0 top
Q3 "SOT23" SOT23 338.58,2305.12 r180 top
Q4 "SOT_23" SOT_23 222.44,3102.36 r270 top
Q5 "SOT23" SOT23 385.83,2669.29 r90 top
Q6 "SOT_23" SOT_23 1366.14,3057.09 r270 top
Q7 "SOT23" SOT23 1131.89,2960.63 r270 top
Q8 "SOT23" SOT23 1131.89,2830.71 r270 top
Q9 "S0T-23" S0T-23 3915.35,112.2 r180 top
Q10 "S0T-23" S0T-23 1295.28,2702.76 r270 top
Q11 "S0T-23" S0T-23 1125.98,2698.82 r270 top
Q12 "SOT23" SOT23 4966.54,3285.43 r270 top
Q13 "SOT23" SOT23 2224.41,2970.47 r270 top
Q14 "SOT23" SOT23 2224.41,2840.55 r270 top
Q17 "S0T-23" S0T-23 2561.02,2899.61 r270 top
R1 "R0402" R0402 2265.75,141.73 r0 top
R2 "R0402" R0402 2179.13,141.73 r180 top
R3 "R0402" R0402 2179.13,183.07 r0 top
R4 "R0402" R0402 2265.75,183.07 r180 top
R5 "R0402" R0402 2265.75,340.55 r180 top
R6 "R0402" R0402 2181.1,340.55 r0 top
R7 "R0402" R0402 2338.58,299.21 r180 top
R8 "R0402" R0402 2265.75,299.21 r180 top
R9 "R0402" R0402 2265.75,261.81 r0 top
R10 "R0402" R0402 2265.75,222.44 r180 top
R11 "R0402" R0402 4812.99,633.86 r0 top
R12 "R0402" R0402 5173.23,431.1 r270 top
R13 "R0402" R0402 5149.61,374.02 r0 top
R14 "R0402" R0402 5370.08,1537.4 r90 top
R15 "R0402" R0402 5330.71,1537.4 r90 top
R16 "R0402" R0402 4588.58,543.31 r90 top
R17 "R0402" R0402 5448.82,1537.4 r270 top
R18 "R0402" R0402 5291.34,1637.8 r90 top
R19 "R0402" R0402 4523.62,474.41 r90 top
R20 "R0402" R0402 5812.99,1490.16 r270 top
R21 "R0402" R0402 5598.43,1826.77 r180 top
R22 "R0402" R0402 5598.43,1864.17 r180 top
R23 "R0402" R0402 5598.43,1938.98 r180 top
R24 "R0402" R0402 5598.43,1901.57 r0 top
R25 "R0402" R0402 5366.14,1238.19 r270 top
R26 "R0402" R0402 5301.18,1025.59 r180 top
R27 "R0402" R0402 5187.01,2003.94 r90 top
R28 "R0402" R0402 5301.18,988.19 r180 top
R29 "R0402" R0402 5005.91,3100.39 r0 top
R30 "R0402" R0402 4545.28,328.74 r90 top
R31 "R0402" R0402 4624.02,474.41 r90 top
R32 "R0402" R0402 4501.97,86.61 r0 top
R33 "R0402" R0402 4433.07,86.61 r0 top
R34 "R0402" R0402 4501.97,124.02 r180 top
R35 "R0402" R0402 1523.62,2413.39 r0 top
R36 "R0603" R0603 259.84,2200.79 r90 top
R37 "R0402" R0402 322.83,2171.26 r0 top
R38 "R0402" R0402 185.04,2746.06 r180 top
R39 "R0402" R0402 322.83,2210.63 r180 top
R40 "R0402" R0402 185.04,2698.82 r0 top
R41 "R0402" R0402 360.24,2399.61 r0 top
R42 "R0402" R0402 198.82,2472.44 r180 top
R43 "R0402" R0402 198.82,2425.2 r0 top
R44 "R0402" R0402 356.3,3047.24 r90 top
R45 "R0402" R0402 561.02,2968.5 r90 top
R46 "R0402" R0402 517.72,2968.5 r90 top
R47 "R0402" R0402 194.88,3194.88 r0 top
R48 "R0402" R0402 474.41,2968.5 r90 top
R49 "R0402" R0402 431.1,2968.5 r90 top
R50 "R0402" R0402 350.39,2753.94 r180 top
R51 "R0402" R0402 474.41,2645.67 r90 top
R52 "R0402" R0402 641.73,2722.44 r90 top
R53 "R0402" R0402 868.11,2789.37 r0 top
R54 "R0402" R0402 604.33,2722.44 r90 top
R55 "R0805" R0805 950.79,3057.09 r0 top
R56 "R0805" R0805 950.79,3125.98 r0 top
R57 "R0402" R0402 868.11,2675.2 r0 top
R58 "R0402" R0402 868.11,2750 r180 top
R59 "R0402" R0402 1338.58,3307.09 r0 top
R60 "R0402" R0402 1338.58,3346.46 r0 top
R61 "R0402" R0402 1383.86,3019.68 r0 top
R62 "R0603" R0603 972.44,2874.02 r90 top
R63 "R0402" R0402 1338.58,3190.94 r0 top
R64 "R0603" R0603 1033.46,2874.02 r90 top
R65 "R0402" R0402 1003.94,2960.63 r90 top
R66 "R0402" R0402 1338.58,3230.31 r180 top
R67 "R0402" R0402 1338.58,3153.54 r180 top
R68 "R0402" R0402 964.57,2960.63 r270 top
R69 "R0402" R0402 1019.69,2773.62 r0 top
R70 "R0402" R0402 1470.47,2785.43 r0 top
R71 "R0201" R0201 4881.89,3153.54 r90 top
R72 "R0402" R0402 4897.64,3198.82 r0 top
R73 "R0402" R0402 1722.44,2476.38 r90 top
R79 "R0402" R0402 240.16,1549.21 r180 top
R80 "R0402" R0402 240.16,1586.61 r0 top
R85 "R0402" R0402 456.69,1761.81 r270 top
R86 "R0402" R0402 314.96,1549.21 r180 top
R87 "R0402" R0402 314.96,1661.42 r0 top
R88 "R0402" R0402 314.96,1586.61 r180 top
R91 "R0402" R0402 5013.78,978.35 r180 top
R92 "R0201" R0201 4303.15,139.76 r90 top
R93 "R0201" R0201 4330.71,139.76 r90 top
R94 "R0402" R0402 4877.95,785.43 r90 top
R95 "R0402" R0402 4375.98,139.76 r90 top
R96 "R0402" R0402 5013.78,1062.99 r180 top
R97 "R0402" R0402 4952.76,785.43 r90 top
R98 "R0402" R0402 4009.84,265.75 r0 top
R99 "R0402" R0402 4009.84,228.35 r0 top
R100 "R0402" R0402 4009.84,153.54 r0 top
R101 "R0402" R0402 4009.84,190.94 r0 top
R102 "R0402" R0402 4781.5,785.43 r270 top
R105 "R0402" R0402 4990.16,785.43 r90 top
R106 "R0402" R0402 4840.55,785.43 r90 top
R107 "R0402" R0402 3937.01,190.94 r180 top
R108 "R0402" R0402 3937.01,228.35 r0 top
R109 "R0201" R0201 3537.4,580.71 r270 top
R110 "R0201" R0201 3629.92,578.74 r270 top
R111 "R0201" R0201 3509.84,580.71 r270 top
R112 "R0201" R0201 3602.36,578.74 r270 top
R113 "R0402" R0402 3202.76,610.24 r90 top
R114 "R0402" R0402 3163.39,610.24 r270 top
R115 "R0402" R0402 3431.1,627.95 r0 top
R116 "R0201" R0201 3903.54,503.94 r0 top
R117 "R0201" R0201 3903.54,590.55 r0 top
R118 "R0402" R0402 3883.86,-23.62 r180 top
R119 "R0402" R0402 4037.4,383.86 r270 top
R120 "R0402" R0402 3883.86,15.75 r0 top
R121 "R0201" R0201 3903.54,476.38 r0 top
R122 "R0201" R0201 3903.54,562.99 r0 top
R124 "R0201" R0201 2297.24,2462.6 r180 top
R126 "R0201" R0201 2297.24,2490.16 r180 top
R127 "R0402" R0402 1267.72,407.48 r180 top
R128 "R0201" R0201 1795.28,572.83 r90 top
R129 "R0201" R0201 1822.83,572.83 r90 top
R132 "R0402" R0402 5303.15,858.27 r0 top
R133 "R0402" R0402 5301.18,708.66 r180 top
R135 "R0402" R0402 5301.18,671.26 r180 top
R138 "R0402" R0402 539.37,1568.9 r180 top
R139 "R0402" R0402 657.48,1531.5 r0 top
R140 "R0402" R0402 539.37,1606.3 r0 top
R141 "R0402" R0402 539.37,1643.7 r0 top
R142 "R0402" R0402 657.48,1494.09 r0 top
R143 "R0402" R0402 872.05,1505.91 r180 top
R147 "R0402" R0402 5381.89,2476.38 r90 top
R148 "R1206" R1206 5748.03,2631.89 r180 top
R149 "R0402" R0402 5328.74,2305.12 r180 top
R150 "R1206" R1206 5350.39,2163.39 r180 top
R151 "R0402" R0402 5328.74,2572.83 r180 top
R152 "R0402" R0402 5328.74,2344.49 r0 top
R153 "R0402" R0402 5328.74,2460.63 r0 top
R154 "R0402" R0402 5328.74,2498.03 r0 top
R155 "R0402" R0402 5594.49,2332.68 r180 top
R156 "R0402" R0402 5328.74,2419.29 r0 top
R157 "R0402" R0402 1606.3,1387.8 r180 top
R158 "R0402" R0402 1606.3,1500 r180 top
R159 "R0402" R0402 1606.3,1537.4 r180 top
R160 "R0402" R0402 1606.3,1574.8 r0 top
R161 "R0402" R0402 1606.3,1462.6 r0 top
R162 "R0603" R0603 1401.57,2675.2 r270 top
R163 "R0402" R0402 1324.8,2783.46 r0 top
R164 "R0402" R0402 1253.94,2783.46 r180 top
R165 "R0402" R0402 1019.69,2736.22 r180 top
R166 "R0402" R0402 1019.69,2696.85 r0 top
R167 "R0402" R0402 539.37,1681.1 r0 top
R168 "R0402" R0402 612.2,1761.81 r270 top
R169 "R0603" R0603 5108.27,2734.25 r0 top
R170 "R0603" R0603 2291.34,2230.31 r180 top
R171 "R0603" R0603 4413.39,568.9 r270 top
R172 "R0402" R0402 2200.79,2267.72 r0 top
R173 "R0402" R0402 1155.51,90.55 r270 top
R174 "R0402" R0402 1238.19,19.68 r90 top
R175 "R0402" R0402 1155.51,19.68 r270 top
R176 "R0402" R0402 2200.79,2230.31 r0 top
R177 "R0402" R0402 2200.79,2192.91 r0 top
R178 "R0402" R0402 1196.85,19.68 r270 top
R179 "R0402" R0402 1196.85,90.55 r270 top
R180 "R0402" R0402 1279.53,19.68 r270 top
R181 "R0402" R0402 1320.87,19.68 r90 top
R182 "R0402" R0402 1403.54,19.68 r90 top
R183 "R0402" R0402 1362.2,19.68 r90 top
R185 "R0603" R0603 4716.54,3068.9 r0 top
R187 "R0402" R0402 1736.22,2706.69 r0 top
R188 "R0402" R0402 1994.09,2769.68 r0 top
R189 "R0805" R0805 1462.6,3250 r180 top
R190 "R0402" R0402 1994.09,2732.28 r180 top
R191 "R0402" R0402 1736.22,2669.29 r0 top
R192 "R0805" R0805 1462.6,3318.9 r180 top
R193 "R0402" R0402 1994.09,2657.48 r180 top
R194 "R0402" R0402 2064.96,3153.54 r180 top
R195 "R0402" R0402 2064.96,3114.17 r0 top
R197 "R0603" R0603 2068.9,2903.54 r90 top
R198 "R0603" R0603 2124.02,2903.54 r90 top
R200 "R0402" R0402 2131.89,2990.16 r90 top
R203 "R0402" R0402 2057.09,2990.16 r270 top
R204 "R0402" R0402 2342.52,2903.54 r180 top
R205 "R0402" R0402 2088.58,2663.39 r0 top
R206 "R0402" R0402 5301.18,1070.87 r0 top
R207 "R0402" R0402 5301.18,1108.27 r0 top
R208 "R0402" R0402 5301.18,803.15 r0 top
R209 "R0402" R0402 5301.18,765.75 r0 top
R220 "R0402" R0402 5033.46,480.31 r180 top
R221 "R0402" R0402 2476.38,2921.26 r270 top
R222 "R0402" R0402 2685.04,2986.22 r0 top
R223 "R0402" R0402 2476.38,2834.65 r90 top
R9209 "R0402" R0402 2438.98,2834.65 r270 top
R9210 "R0402" R0402 2163.39,3330.71 r180 top
R9211 "R0402" R0402 2147.64,3283.46 r90 top
R9212 "R0603" R0603 5450.79,1293.31 r270 top
RP1 "RN8P4RC" RN8P4RC 1631.89,2931.1 r180 top
TP1 "TP_0R70" TP_0R70 5106.3,3.94 r170.54 bottom
TP2 "TP_0R70" TP_0R70 5106.3,122.05 r170.54 bottom
TP3 "TP_0R70" TP_0R70 5106.3,181.1 r170.54 bottom
TP4 "TP_0R70" TP_0R70 5106.3,-55.12 r170.54 bottom
TP5 "TP_0R70" TP_0R70 5106.3,62.99 r170.54 bottom
TP6 "TP_0R70" TP_0R70 4998.03,1015.75 r90 bottom
TP7 "TP_0R70" TP_0R70 521.65,2316.93 r0 bottom
TP8 "TP_0R70" TP_0R70 470.47,2316.93 r0 bottom
TP9 "TP_0R70" TP_0R70 5338.58,2848.43 r180 bottom
TP10 "TP_0R70" TP_0R70 5397.64,2631.89 r180 bottom
TP11 "TP_0R70" TP_0R70 5338.58,2799.21 r180 bottom
U1 "SON10_2R50X1R00X0R50" SON10_2R50X1R00X0R50 895.67,348.43 r180 top
U2 "SON10_2R50X1R00X0R50" SON10_2R50X1R00X0R50 777.56,348.43 r180 top
U3 "SMD_1D25X2PIN_90" SMD_1D25X2PIN_90 5340.55,3200.79 r0 top
U5 "SON10_2R50X1R00X0R50" SON10_2R50X1R00X0R50 2606.3,720.47 r0 top
U6 "SON10_2R50X1R00X0R50" SON10_2R50X1R00X0R50 2714.57,720.47 r0 top
U7 "SOT_23_6" SOT_23_6 5397.64,1659.45 r270 top
U8 "QFN20-2D5X4D5" QFN20-2D5X4D5 5415.35,1094.49 r270 top
U9 "SOT_23_5" SOT_23_5 326.77,2511.81 r0 top
U10 "DFN10P_3X3" DFN10P_3X3 738.19,2769.68 r90 top
U11 "SOT25" SOT25 1448.82,2887.8 r0 top
U13 "CRY4_3R20X2R50X0R80" CRY4_3R20X2R50X0R80 358.27,1744.09 r180 top
U17 "QFN24" QFN24 4830.71,962.6 r180 top
U18 "SOT_23_5" SOT_23_5 3311.02,588.58 r180 top
U19 "SOT_23_5" SOT_23_5 3937.01,360.24 r180 top
U20 "SOT_23_5" SOT_23_5 1228.35,320.87 r180 top
U22 "QFN20-2D5X4D5" QFN20-2D5X4D5 5415.35,789.37 r270 top
U23 "BAT_CR1220" BAT_CR1220 826.77,2360.24 r90 top
U24 "MSOP8" MSOP8 748.03,1620.08 r180 top
U27 "QFN12_2R00X3R00X1R00" QFN12_2R00X3R00X1R00 5452.76,2342.52 r90 top
U28 "XIAO_4PIN_2D54" XIAO_4PIN_2D54 5240.55,294.88 r270 top
U29 "SOT_23_6" SOT_23_6 1486.22,1501.97 r0 top
U30 "DIP_14PIN-2_54MM" DIP_14PIN-2_54MM 1793.31,2226.38 r0 top
U31 "DIP3_1X2P54" DIP3_1X2P54 6061.02,2736.22 r270 top
U32 "DIP3_1X2P54" DIP3_1X2P54 5907.87,2736.22 r270 top
U33 "DF40C-200DS-D4-OK" DF40C-200DS-D4-OK 3796.46,2323.03 r0 top
U34 "DFN10P_3X3" DFN10P_3X3 1875.98,2726.38 r90 top
U35 "SOT25" SOT25 2214.57,2700.79 r270 top
U36 "DIP4_1X2P54" DIP4_1X2P54 1946.85,2492.13 r180 top
U37 "DC-044A" DC-044A 6159.45,3192.91 r90 top
U90074 "LCD39PIN-OK" LCD39PIN-OK 2066.93,3336.61 r90 top
USB6 "USB30-L1" USB30-L1 1811.02,307.09 r0 top
Y1 "CRY4_3R20X2R50X0R80" CRY4_3R20X2R50X0R80 4864.17,1185.04 r180 top
Y2 "CRY-3215" CRY-3215 968.5,1566.93 r90 top

## Footprints (in the part's own frame and the unit in brackets; to place one, negate y for a bottom-side part, rotate by r counter-clockwise, add the part's x,y. Pads: shape width x height; smd on the part's side, far side on the other; paste and mask are expansions set on the pad)
20455-040E-TOP [mm]
  rect 0.3x0.9 smd: 1(-20.4,0) 2(-19.9,0) 3(-19.4,0) 4(-18.9,0) 5(-18.4,0) 6(-17.9,0) 7(-17.4,0) 8(-16.9,0) 9(-16.4,0) 10(-15.9,0) 11(-15.4,0) 12(-14.9,0) 13(-14.4,0) 14(-13.9,0) 15(-13.4,0) 16(-12.9,0) 17(-12.4,0) 18(-11.9,0) 19(-11.4,0) 20(-10.9,0) 21(-10.4,0) 22(-9.9,0) 23(-9.4,0) 24(-8.9,0) 25(-8.4,0) 26(-7.9,0) 27(-7.4,0) 28(-6.9,0) 29(-6.4,0) 30(-5.9,0) 31(-5.4,0) 32(-4.9,0) 33(-4.4,0) 34(-3.9,0) 35(-3.4,0) 36(-2.9,0) 37(-2.4,0) 38(-1.9,0) 39(-1.4,0) 40(-0.9,0)
  rect 0.55x0.9 smd: 41(0,0) 42(-21.3,0)
  rect 1.4x1.9 smd: 43(-23.5,-2.82) 44(2.2,-2.82)
  silkscreen extent -24.8,-5.3 3.5,1.4
BAT_CR1220 [mm]
  rect 3.099x4.064 smd: 1(0,8.348) 2(0,-8.134)
  round 1.2 hole 1.2 unplated: 3(0,-3.685)
  round 1.3 hole 1.3 unplated: 4(0,3.815)
  silkscreen extent -6.99,-6.61 7.47,8.76
C0402 [mm]
  rect 0.5x0.5 smd: 1(-0.4,0) 2(0.4,0)
  silkscreen extent -0.8,-0.4 0.8,0.4
C0603 [mm]
  rect 0.7x0.9 smd: 1(-0.7,0) 2(0.7,0)
  silkscreen extent -1.2,-0.6 1.2,0.6
C0805 [mm]
  rect 0.9x1.3 smd: 1(-0.85,0) 2(0.85,0)
  silkscreen extent -1.5,-0.8 1.5,0.8
C1206 [mil]
  rect 55x63 smd mask+2.5: 1(-49.21,0) 2(49.21,0)
  silkscreen extent -90,-46 90,46
CRY4_3R20X2R50X0R80 [mm]
  rect 1.4x1.2 smd: 1(-1.1,-0.85) 2(1.1,-0.85) 3(1.1,0.85) 4(-1.1,0.85)
  silkscreen extent -1.6,-2.02 1.6,1.26
CRY-3215 [mm]
  rect 0.65x1.3 smd: 1(0,0) 2(2.35,0)
  round 0.55 smd: 3(1.175,0)
  silkscreen extent -0.6,-0.8 2.9,0.8
DC-044A [mm]
  oval 1.2x2.5 / inner oval 1.2x2.5 / far side oval 1.5x2.8 hole 0.787 slot 1.981 at 90 deg: 1(3.2,10.2) 2(-5.3,10.2) 3(0,10.2)
  oval 1x2.5 / inner oval 1x2.5 / far side oval 1.2x2.8 hole 0.6 slot 1.981 at 90 deg: 4(-6.2,3) 5(3.6,3)
  round 2.12 hole 2.12: 6(-0.009,3.991)
  silkscreen extent -6.3,0 4.5,11.6
DF40C-200DS-D4-OK [mm]
  rect 1.14x0.2 smd: 1(18.39,-7.32) 2(15.73,-7.32) 3(18.39,-6.92) 4(15.73,-6.92) 5(18.39,-6.52) 6(15.73,-6.52) 7(18.39,-6.12) 8(15.73,-6.12) 9(18.39,-5.72) 10(15.73,-5.72) 11(18.39,-5.32) 12(15.73,-5.32) 13(18.39,-4.92) 14(15.73,-4.92) 15(18.39,-4.52) 16(15.73,-4.52) 17(18.39,-4.12) 18(15.73,-4.12) 19(18.39,-3.72) 20(15.73,-3.72) 21(18.39,-3.32) 22(15.73,-3.32) 23(18.39,-2.92) 24(15.73,-2.92) 25(18.39,-2.52) 26(15.73,-2.52) 27(18.39,-2.12) 28(15.73,-2.12) 29(18.39,-1.72) 30(15.73,-1.72) 31(18.39,-1.32) 32(15.73,-1.32) 33(18.39,-0.92) 34(15.73,-0.92) 35(18.39,-0.52) 36(15.73,-0.52) 37(18.39,-0.12) 38(15.73,-0.12) 39(18.39,0.28) 40(15.73,0.28) 41(18.39,0.68) 42(15.73,0.68) 43(18.39,1.08) 44(15.73,1.08) 45(18.39,1.48) 46(15.73,1.48) 47(18.39,1.88) 48(15.73,1.88) 49(18.39,2.28) 50(15.73,2.28) 51(18.39,2.68) 52(15.73,2.68) 53(18.39,3.08) 54(15.73,3.08) 55(18.39,3.48) 56(15.73,3.48) 57(18.39,3.88) 58(15.73,3.88) 59(18.39,4.28) 60(15.73,4.28) 61(18.39,4.68) 62(15.73,4.68) 63(18.39,5.08) 64(15.73,5.08) 65(18.39,5.48) 66(15.73,5.48) 67(18.39,5.88) 68(15.73,5.88) 69(18.39,6.28) 70(15.73,6.28) 71(18.39,6.68) 72(15.73,6.68) 73(18.39,7.08) 74(15.73,7.08) 75(18.39,7.48) 76(15.73,7.48) 77(18.39,7.88) 78(15.73,7.88) 79(18.39,8.28) 80(15.73,8.28) 81(18.39,8.68) 82(15.73,8.68) 83(18.39,9.08) 84(15.73,9.08) 85(18.39,9.48) 86(15.73,9.48) 87(18.39,9.88) 88(15.73,9.88) 89(18.39,10.28) 90(15.73,10.28) 91(18.39,10.68) 92(15.73,10.68) 93(18.39,11.08) 94(15.73,11.08) 95(18.39,11.48) 96(15.73,11.48) 97(18.39,11.88) 98(15.73,11.88) 99(18.39,12.28) 100(15.73,12.28) 101(-15.68,-7.32) 102(-18.32,-7.32) 103(-15.68,-6.92) 104(-18.32,-6.92) 105(-15.68,-6.52) 106(-18.32,-6.52) 107(-15.68,-6.12) 108(-18.32,-6.12) 109(-15.68,-5.72) 110(-18.32,-5.72) 111(-15.68,-5.32) 112(-18.32,-5.32) 113(-15.68,-4.92) 114(-18.32,-4.92) 115(-15.68,-4.52) 116(-18.32,-4.52) 117(-15.68,-4.12) 118(-18.32,-4.12) 119(-15.68,-3.72) 120(-18.32,-3.72) 121(-15.68,-3.32) 122(-18.32,-3.32) 123(-15.68,-2.92) 124(-18.32,-2.92) 125(-15.68,-2.52) 126(-18.32,-2.52) 127(-15.68,-2.12) 128(-18.32,-2.12) 129(-15.68,-1.72) 130(-18.32,-1.72) 131(-15.68,-1.32) 132(-18.32,-1.32) 133(-15.68,-0.92) 134(-18.32,-0.92) 135(-15.68,-0.52) 136(-18.32,-0.52) 137(-15.68,-0.12) 138(-18.32,-0.12) 139(-15.68,0.28) 140(-18.32,0.28) 141(-15.68,0.68) 142(-18.32,0.68) 143(-15.68,1.08) 144(-18.32,1.08) 145(-15.68,1.48) 146(-18.32,1.48) 147(-15.68,1.88) 148(-18.32,1.88) 149(-15.68,2.28) 150(-18.32,2.28) 151(-15.68,2.68) 152(-18.32,2.68) 153(-15.68,3.08) 154(-18.32,3.08) 155(-15.68,3.48) 156(-18.32,3.48) 157(-15.68,3.88) 158(-18.32,3.88) 159(-15.68,4.28) 160(-18.32,4.28) 161(-15.68,4.68) 162(-18.32,4.68) 163(-15.68,5.08) 164(-18.32,5.08) 165(-15.68,5.48) 166(-18.32,5.48) 167(-15.68,5.88) 168(-18.32,5.88) 169(-15.68,6.28) 170(-18.32,6.28) 171(-15.68,6.68) 172(-18.32,6.68) 173(-15.68,7.08) 174(-18.32,7.08) 175(-15.68,7.48) 176(-18.32,7.48) 177(-15.68,7.88) 178(-18.32,7.88) 179(-15.68,8.28) 180(-18.32,8.28) 181(-15.68,8.68) 182(-18.32,8.68) 183(-15.68,9.08) 184(-18.32,9.08) 185(-15.68,9.48) 186(-18.32,9.48) 187(-15.68,9.88) 188(-18.32,9.88) 189(-15.68,10.28) 190(-18.32,10.28) 191(-15.68,10.68) 192(-18.32,10.68) 193(-15.68,11.08) 194(-18.32,11.08) 195(-15.68,11.48) 196(-18.32,11.48) 197(-15.68,11.88) 198(-18.32,11.88) 199(-15.68,12.28) 200(-18.32,12.28)
  round 6 hole 2.6: 201(16.51,-23.98) 202(-16.49,-23.98) 203(-16.51,23.97) 204(16.49,23.97)
  silkscreen extent -19.99,-27.48 20.03,27.5
DF40C_100DS [mm]
  rect 1.14x0.2 smd: 1(2.73,-1.5) 2(0.09,-1.5) 3(2.73,-1.9) 4(0.09,-1.9) 5(2.73,-2.3) 6(0.09,-2.3) 7(2.73,-2.7) 8(0.09,-2.7) 9(2.73,-3.1) 10(0.09,-3.1) 11(2.73,-3.5) 12(0.09,-3.5) 13(2.73,-3.9) 14(0.09,-3.9) 15(2.73,-4.3) 16(0.09,-4.3) 17(2.73,-4.7) 18(0.09,-4.7) 19(2.73,-5.1) 20(0.09,-5.1) 21(2.73,-5.5) 22(0.09,-5.5) 23(2.73,-5.9) 24(0.09,-5.9) 25(2.73,-6.3) 26(0.09,-6.3) 27(2.73,-6.7) 28(0.09,-6.7) 29(2.73,-7.1) 30(0.09,-7.1) 31(2.73,-7.5) 32(0.09,-7.5) 33(2.73,-7.9) 34(0.09,-7.9) 35(2.73,-8.3) 36(0.09,-8.3) 37(2.73,-8.7) 38(0.09,-8.7) 39(2.73,-9.1) 40(0.09,-9.1) 41(2.73,-9.5) 42(0.09,-9.5) 43(2.73,-9.9) 44(0.09,-9.9) 45(2.73,-10.3) 46(0.09,-10.3) 47(2.73,-10.7) 48(0.09,-10.7) 49(2.73,-11.1) 50(0.09,-11.1) 51(2.73,-11.5) 52(0.09,-11.5) 53(2.73,-11.9) 54(0.09,-11.9) 55(2.73,-12.3) 56(0.09,-12.3) 57(2.73,-12.7) 58(0.09,-12.7) 59(2.73,-13.1) 60(0.09,-13.1) 61(2.73,-13.5) 62(0.09,-13.5) 63(2.73,-13.9) 64(0.09,-13.9) 65(2.73,-14.3) 66(0.09,-14.3) 67(2.73,-14.7) 68(0.09,-14.7) 69(2.73,-15.1) 70(0.09,-15.1) 71(2.73,-15.5) 72(0.09,-15.5) 73(2.73,-15.9) 74(0.09,-15.9) 75(2.73,-16.3) 76(0.09,-16.3) 77(2.73,-16.7) 78(0.09,-16.7) 79(2.73,-17.1) 80(0.09,-17.1) 81(2.73,-17.5) 82(0.09,-17.5) 83(2.73,-17.9) 84(0.09,-17.9) 85(2.73,-18.3) 86(0.09,-18.3) 87(2.73,-18.7) 88(0.09,-18.7) 89(2.73,-19.1) 90(0.09,-19.1) 91(2.73,-19.5) 92(0.09,-19.5) 93(2.73,-19.9) 94(0.09,-19.9) 95(2.73,-20.3) 96(0.09,-20.3) 97(2.73,-20.7) 98(0.09,-20.7) 99(2.73,-21.1) 100(0.09,-21.1)
  silkscreen extent 0,-22.54 2.84,0.01
DFN10P_3X3 [mm]
  rect 0.3x0.55 smd: 1(-1,-1.34) 2(-0.5,-1.34) 3(0,-1.34) 4(0.5,-1.34) 5(1,-1.34) 6(1,1.35) 7(0.5,1.35) 8(0,1.35) 9(-0.5,1.35) 10(-1,1.35)
  rect 2.6x1.75 smd: 11(0,0)
  silkscreen extent -1.48,-1.93 1.48,1.52
DIP2PIN-2P54MM [mm]
  rect 1.3x1.3 / inner rect 1.5x1.5 / far side rect 1.5x1.5 hole 0.9 mask+0.1: 1(0,0)
  round 1.3 / inner round 1.5 / far side round 1.5 hole 0.9 mask+0.1: 2(0,-2.54)
  silkscreen extent -1.25,-3.79 1.25,1.25
DIP3_1X2P54 [mm]
  round 1.1 / inner round 1.1 / far side round 1.6 hole 1: 1(-2.54,0) 2(0,0) 3(2.54,0)
  silkscreen extent -3.81,-1.9 3.81,1.27
DIP4_1X2P54 [mm]
  round 1.1 / inner round 1.1 / far side round 1.6 hole 1: 1(-3.82,0.01) 2(-1.28,0.01) 3(1.26,0.01) 4(3.8,0.01)
  silkscreen extent -5.09,-1.89 5.04,1.28
DIP4PIN-2_54MM-2X2 [mm]
  round 1.6 / inner round 1.27 / far side round 1.6 hole 0.889: 1(2.54,-2.54) 2(2.54,0) 3(0,-2.54)
  rect 1.6x1.6 hole 0.889: 4(0,0)
  silkscreen extent 2.9,-2.75 2.9,-2.1
DIP40PIN_2D54MM [mm]
  round 1.5 / inner round 1.15 / far side round 1.5 hole 0.9: 1(0,-2.54) 2(0,0) 3(2.54,-2.54) 4(2.54,0) 5(5.08,-2.54) 6(5.08,0) 7(7.62,-2.54) 8(7.62,0) 9(10.16,-2.54) 10(10.16,0) 11(12.7,-2.54) 12(12.7,0) 13(15.24,-2.54) 14(15.24,0) 15(17.78,-2.54) 16(17.78,0) 17(20.32,-2.54) 18(20.32,0) 19(22.86,-2.54) 20(22.86,0) 21(25.4,-2.54) 22(25.4,0) 23(27.94,-2.54) 24(27.94,0) 25(30.48,-2.54) 26(30.48,0) 27(33.02,-2.54) 28(33.02,0) 29(35.56,-2.54) 30(35.56,0) 31(38.1,-2.54) 32(38.1,0) 33(40.64,-2.54) 34(40.64,0) 35(43.18,-2.54) 36(43.18,0) 37(45.72,-2.54) 38(45.72,0) 39(48.26,-2.54) 40(48.26,0)
DIP_10PIN-2_54MM [mil]
  round 60 / inner round 45.28 / far side round 60 hole 35.43 mask+1.99: 1(-200.79,-50) 2(-200.79,50) 3(-100.79,-50) 4(-100.79,50) 5(-0.79,-50) 6(-0.79,50) 7(99.21,-50) 8(99.21,50) 9(199.21,-50) 10(199.21,50)
  silkscreen extent -252,-100 251,100
DIP_14PIN-2_54MM [mil]
  round 60 / inner round 45.28 / far side round 60 hole 35.43 mask+1.99: 1(-300,-50.39) 2(-300,49.61) 3(-200,-50.39) 4(-200,49.61) 5(-100,-50.39) 6(-100,49.61) 7(0,-50.39) 8(0,49.61) 9(100,-50.39) 10(100,49.61) 11(200,-50.39) 12(200,49.61) 13(300,-50.39) 14(300,49.61)
  silkscreen extent -351,-100 352,100
DO214AC [mm]
  rect 1.8x2 smd: 1(3.6,0) 2(-0.2,0)
  silkscreen extent -0.34,-1.24 3.66,1.26
DO_214AC [mm]
  rect 2.5x2 smd mask+0.05: 1(-2,0) 2(2,0)
  silkscreen extent -3.54,-1.65 3.68,1.65
ESD0402_1XD5 [mm]
  rect 0.4x0.55 smd: 1(-0.45,0) 2(0.45,0)
  Top region: 0.318,0.178 0.152,0.013 0.324,-0.159 0.324,0.165 0.318,0.165 0.318,0.178
  Top region: 0.368,0.279 0.095,0.006 0.375,-0.273 0.375,0.267 0.368,0.267 0.368,0.279
  Top region: -0.305,-0.165 -0.14,0 -0.311,0.171 -0.311,-0.152 -0.305,-0.152 -0.305,-0.165
  Top region: -0.356,-0.267 -0.083,0.006 -0.362,0.286 -0.362,-0.254 -0.356,-0.254 -0.356,-0.267
  Top lines w0.051: 0.508,0.191 0.317,0.191 ; 0.508,-0.178 0.318,-0.178 ; 0.47,0.152 0.279,0.152 ; 0.47,-0.14 0.279,-0.14 ; 0.445,-0.102 0.254,-0.102 ; 0.432,0.114 0.241,0.114 ; 0.419,-0.076 0.229,-0.076 ; 0.406,0.076 0.216,0.076 ; 0.394,-0.051 0.203,-0.051 ; 0.368,0.051 0.178,0.051 ; 0.356,-0.025 0.165,-0.025 ; 0.343,0.025 0.152,0.025 ; 0.33,0 0.14,0 ; -0.127,0.013 -0.318,0.013 ; -0.14,-0.013 -0.33,-0.013 ; -0.152,0.038 -0.343,0.038 ; -0.165,-0.038 -0.356,-0.038 ; -0.191,0.063 -0.381,0.063 ; -0.203,-0.064 -0.394,-0.064 ; -0.216,0.089 -0.406,0.089 ; -0.229,-0.102 -0.419,-0.102 ; -0.241,0.114 -0.432,0.114 ; -0.267,0.152 -0.457,0.152 ; -0.267,-0.14 -0.457,-0.14 ; -0.305,0.19 -0.495,0.19 ; -0.305,-0.178 -0.495,-0.178
  silkscreen extent -0.85,-0.4 0.85,0.4
FH35C_31P_0_6SHW_LCD [mm]
  rect 0.3x1.372 smd: 1(9,0) 2(8.7,2.875) 3(8.4,0) 4(8.1,2.875) 5(7.8,0) 6(7.5,2.875) 7(7.2,0) 8(6.9,2.875) 9(6.6,0) 10(6.3,2.875) 11(6,0) 12(5.7,2.875) 13(5.4,0) 14(5.1,2.875) 15(4.8,0) 16(4.5,2.875) 17(4.2,0) 18(3.9,2.875) 19(3.6,0) 20(3.3,2.875) 21(3,0) 22(2.7,2.875) 23(2.4,0) 24(2.1,2.875) 25(1.8,0) 26(1.5,2.875) 27(1.2,0) 28(0.9,2.875) 29(0.6,0) 30(0.3,2.875) 31(0,0)
  rect 0.7x1.5 smd: 32(9.84,0.335) 33(-0.84,0.335)
  silkscreen extent -1.07,-1.53 10,3.31
FPC6-0.5MM-2660H [mm]
  oval 0.254x2.032 smd: 1(-1.25,0) 2(-0.75,0) 3(-0.25,0) 4(0.25,0) 5(0.75,0) 6(1.25,0)
  rect 2x3 smd paste-0.484 mask-0.484: 7(3.8,-3.5) 8(-3.8,-3.5)
  silkscreen extent -4.9,-5.39 4.9,1
FPC_15PIN_1MM [mil]
  rect 27.6x63 smd: 1(-551.17,0) 2(-511.77,0) 3(-472.47,0) 4(-433.07,0) 5(-393.7,0) 6(-354.33,0) 7(-314.96,0) 8(-275.59,0) 9(-236.22,0) 10(-196.85,0) 11(-157.48,0) 12(-118.11,0) 13(-78.74,0) 14(-39.37,0) 15(0,0)
  rect 63x78.7 smd: 16(98.43,102.4) 17(-649.57,102.4)
  silkscreen extent -661,-77 114,193
HDMIA19S [mm]
  rect 0.3x2.6 smd: 1(-4.5,0) 2(-4,0) 3(-3.5,0) 4(-3,0) 5(-2.5,0) 6(-2,0) 7(-1.5,0) 8(-1,0) 9(-0.5,0) 10(0,0) 11(0.5,0) 12(1,0) 13(1.5,0) 14(2,0) 15(2.5,0) 16(3,0) 17(3.5,0) 18(4,0) 19(4.5,0)
  oval 1.3x3.2 hole 0.787 slot 2.692 at 90 deg: 20(7.25,1) 21(-7.25,1)
  oval 1.3x2.2 hole 0.787 slot 1.676 at 90 deg: 22(-7.25,6.96) 23(7.25,6.96)
  silkscreen extent -7.5,0 7.5,9.45
HOLE_R6_2D7MM [mm]
  round 2.7 hole 2.7 unplated: 1(0,0)
  Top keep-out region: 3.003,0 2.774,1.149 2.123,2.123 1.149,2.774 0,3.003 0,3.003 -1.149,2.774 -2.123,2.123 -2.774,1.149 -3.003,0 -3.003,0 -2.774,-1.149 -2.123,-2.123 -1.149,-2.774 0,-3.003 0,-3.003 1.149,-2.774 2.123,-2.123 2.774,-1.149 3.003,0
  Bottom keep-out region: 3.003,0 2.774,1.149 2.123,2.123 1.149,2.774 0,3.003 0,3.003 -1.149,2.774 -2.123,2.123 -2.774,1.149 -3.003,0 -3.003,0 -2.774,-1.149 -2.123,-2.123 -1.149,-2.774 0,-3.003 0,-3.003 1.149,-2.774 2.123,-2.123 2.774,-1.149 3.003,0
IND-4X4 [mm]
  rect 1.5x4 smd mask+0.051: 1(-1.5,0) 2(1.5,0)
  silkscreen extent -0.85,-1.9 0.85,1.9
IND-5020 [mm]
  rect 1.4x2.8 smd: 1(-2.2,0) 2(2.2,0)
  silkscreen extent -2.7,-2.55 2.7,2.55
L0402 [mm]
  rect 0.5x0.5 smd: 1(-0.45,0) 2(0.45,0)
  silkscreen extent -0.8,-0.35 0.8,0.35
LCD39PIN-OK [mil]
  rect 54x10 smd: 1(0,0) 2(-113.18,11.81) 3(0,23.62) 4(-113.18,35.43) 5(0,47.24) 6(-113.18,59.06) 7(0,70.87) 8(-113.18,82.68) 9(0,94.49) 10(-113.18,106.3) 11(0,118.11) 12(-113.18,129.92) 13(0,141.73) 14(-113.18,153.54) 15(0,165.35) 16(-113.18,177.17) 17(0,188.98) 18(-113.18,200.79) 19(0,212.6) 20(-113.18,224.41) 21(0,236.22) 22(-113.18,248.03) 23(0,259.84) 24(-113.18,271.65) 25(0,283.46) 26(-113.18,295.28) 27(0,307.09) 28(-113.18,318.9) 29(0,330.71) 30(-113.18,342.52) 31(0,354.33) 32(-113.18,366.14) 33(0,377.95) 34(-113.18,389.76) 35(0,401.57) 36(-113.18,413.39) 37(0,425.2) 38(-113.18,437.01) 39(0,448.82)
  rect 59.06x15.75 smd: 40(-13.18,476.38) 41(-13.18,-27.56)
  silkscreen extent -130,-33 -54,483
LED0603 [mm]
  rect 0.8x0.8 smd: 1(-0.869,0.001) 2(0.869,-0.001)
  silkscreen extent -1.41,-0.65 1.41,0.65
MARK [mm]
  round 1 smd: 1(0,0)
  silkscreen extent -1.65,-1.65 1.65,1.65
MICRO_USB_NJ2 [mm]
  rect 0.4x1.5 smd: 1(-1.3,0.2) 2(-0.65,0.2) 3(0,0.2) 4(0.65,0.2) 5(1.3,0.2)
  rrect100% 1.2x1.2 hole 0.7: 6(-3.3,0) 7(3.3,0)
  oval 1.4x2 hole 1.1 slot 1.5 at 90 deg: 8(-3.6,-2.8) 9(3.6,-2.8)
  rect 2x1.5 smd: 10(-1.6,-2.8) 11(1.6,-2.8)
  round 0.7 hole 0.7 unplated: 12(-1.95,-0.9) 13(1.95,-0.9)
  silkscreen extent -4.3,-5.28 4.3,1.55
MSOP8 [mm]
  rect 1x0.4 smd: 1(-2.4,0.947) 2(-2.4,0.297) 3(-2.4,-0.353) 4(-2.4,-1.003) 5(2.4,-1.003) 6(2.4,-0.353) 7(2.4,0.297) 8(2.4,0.947)
  silkscreen extent -3.36,-1.52 3.05,2.03
PCIEX1_36PIN_DIP [mm]
  round 1.3 hole 0.75: A1(-11.65,1.25) A2(-10.65,3.25) A3(-9.65,1.25) A4(-8.65,3.25) A5(-7.65,1.25) A6(-6.65,3.25) A7(-5.65,1.25) A8(-4.65,3.25) A9(-3.65,1.25) A10(-2.65,3.25) A11(-1.65,1.25) A12(1.35,3.25) A13(2.35,1.25) A14(3.35,3.25) A15(4.35,1.25) A16(5.35,3.25) A17(6.35,1.25) A18(7.35,3.25) B1(-11.65,-1.25) B2(-10.65,-3.25) B3(-9.65,-1.25) B4(-8.65,-3.25) B5(-7.65,-1.25) B6(-6.65,-3.25) B7(-5.65,-1.25) B8(-4.65,-3.25) B9(-3.65,-1.25) B10(-2.65,-3.25) B11(-1.65,-1.25) B12(1.35,-3.25) B13(2.35,-1.25) B14(3.35,-3.25) B15(4.35,-1.25) B16(5.35,-3.25) B17(6.35,-1.25) B18(7.35,-3.25)
  round 2.35 hole 2.35: C1(0,0) C2(9.15,0)
  silkscreen extent -14.67,-4.25 10.35,4.25
PJ-327A [mm]
  round 1.5 hole 1.5: 1(0,0) 8(7,0)
  oval 2x1.2 / inner oval 1.6x0.8 / far side oval 2x1.2 hole 0.686 slot 1.499 at 0 deg: 2(-0.2,2.05) 5(-0.2,-2.65)
  rect 1.3x2 smd: 3(6.8,3.55) 4(9.1,3.55) 6(3.1,-3.55) 7(8.6,-3.55)
  silkscreen extent -4.6,-3.2 9.6,3.2
QFN12_2R00X3R00X1R00 [mm]
  rect 1.5x0.25 smd: 1(-0.55,0.5) 2(-0.55,-0.5) 7(0.55,0)
  rect 0.25x0.7 smd: 3(-0.75,-1.45) 4(-0.25,-1.45) 5(0.25,-1.45) 6(0.75,-1.45) 9(0.75,1.45) 10(0.25,1.45) 11(-0.25,1.45) 12(-0.75,1.45)
  rect 0.7x0.25 smd: 8(0.95,0.5)
  silkscreen extent -1.81,-1.5 1,1.5
QFN20-2D5X4D5 [mm]
  rect 0.25x0.6 smd: 1(-1.74,-1.14) 2(-1.24,-1.14) 3(-0.74,-1.14) 4(-0.24,-1.14) 5(0.26,-1.14) 6(0.76,-1.14) 7(1.26,-1.14) 8(1.76,-1.14) 11(1.76,1.16) 12(1.26,1.16) 13(0.76,1.16) 14(0.26,1.16) 15(-0.24,1.16) 16(-0.74,1.16) 17(-1.24,1.16) 18(-1.74,1.16)
  rect 0.6x0.25 smd: 9(2.13,-0.25) 10(2.13,0.25) 19(-2.13,0.25) 20(-2.13,-0.25)
  rect 3x1.1 smd: 21(0,0)
  silkscreen extent -2.23,-2.01 2.27,1.26